# Allegro board MOCKINGBIRD_R01_20150507.brd
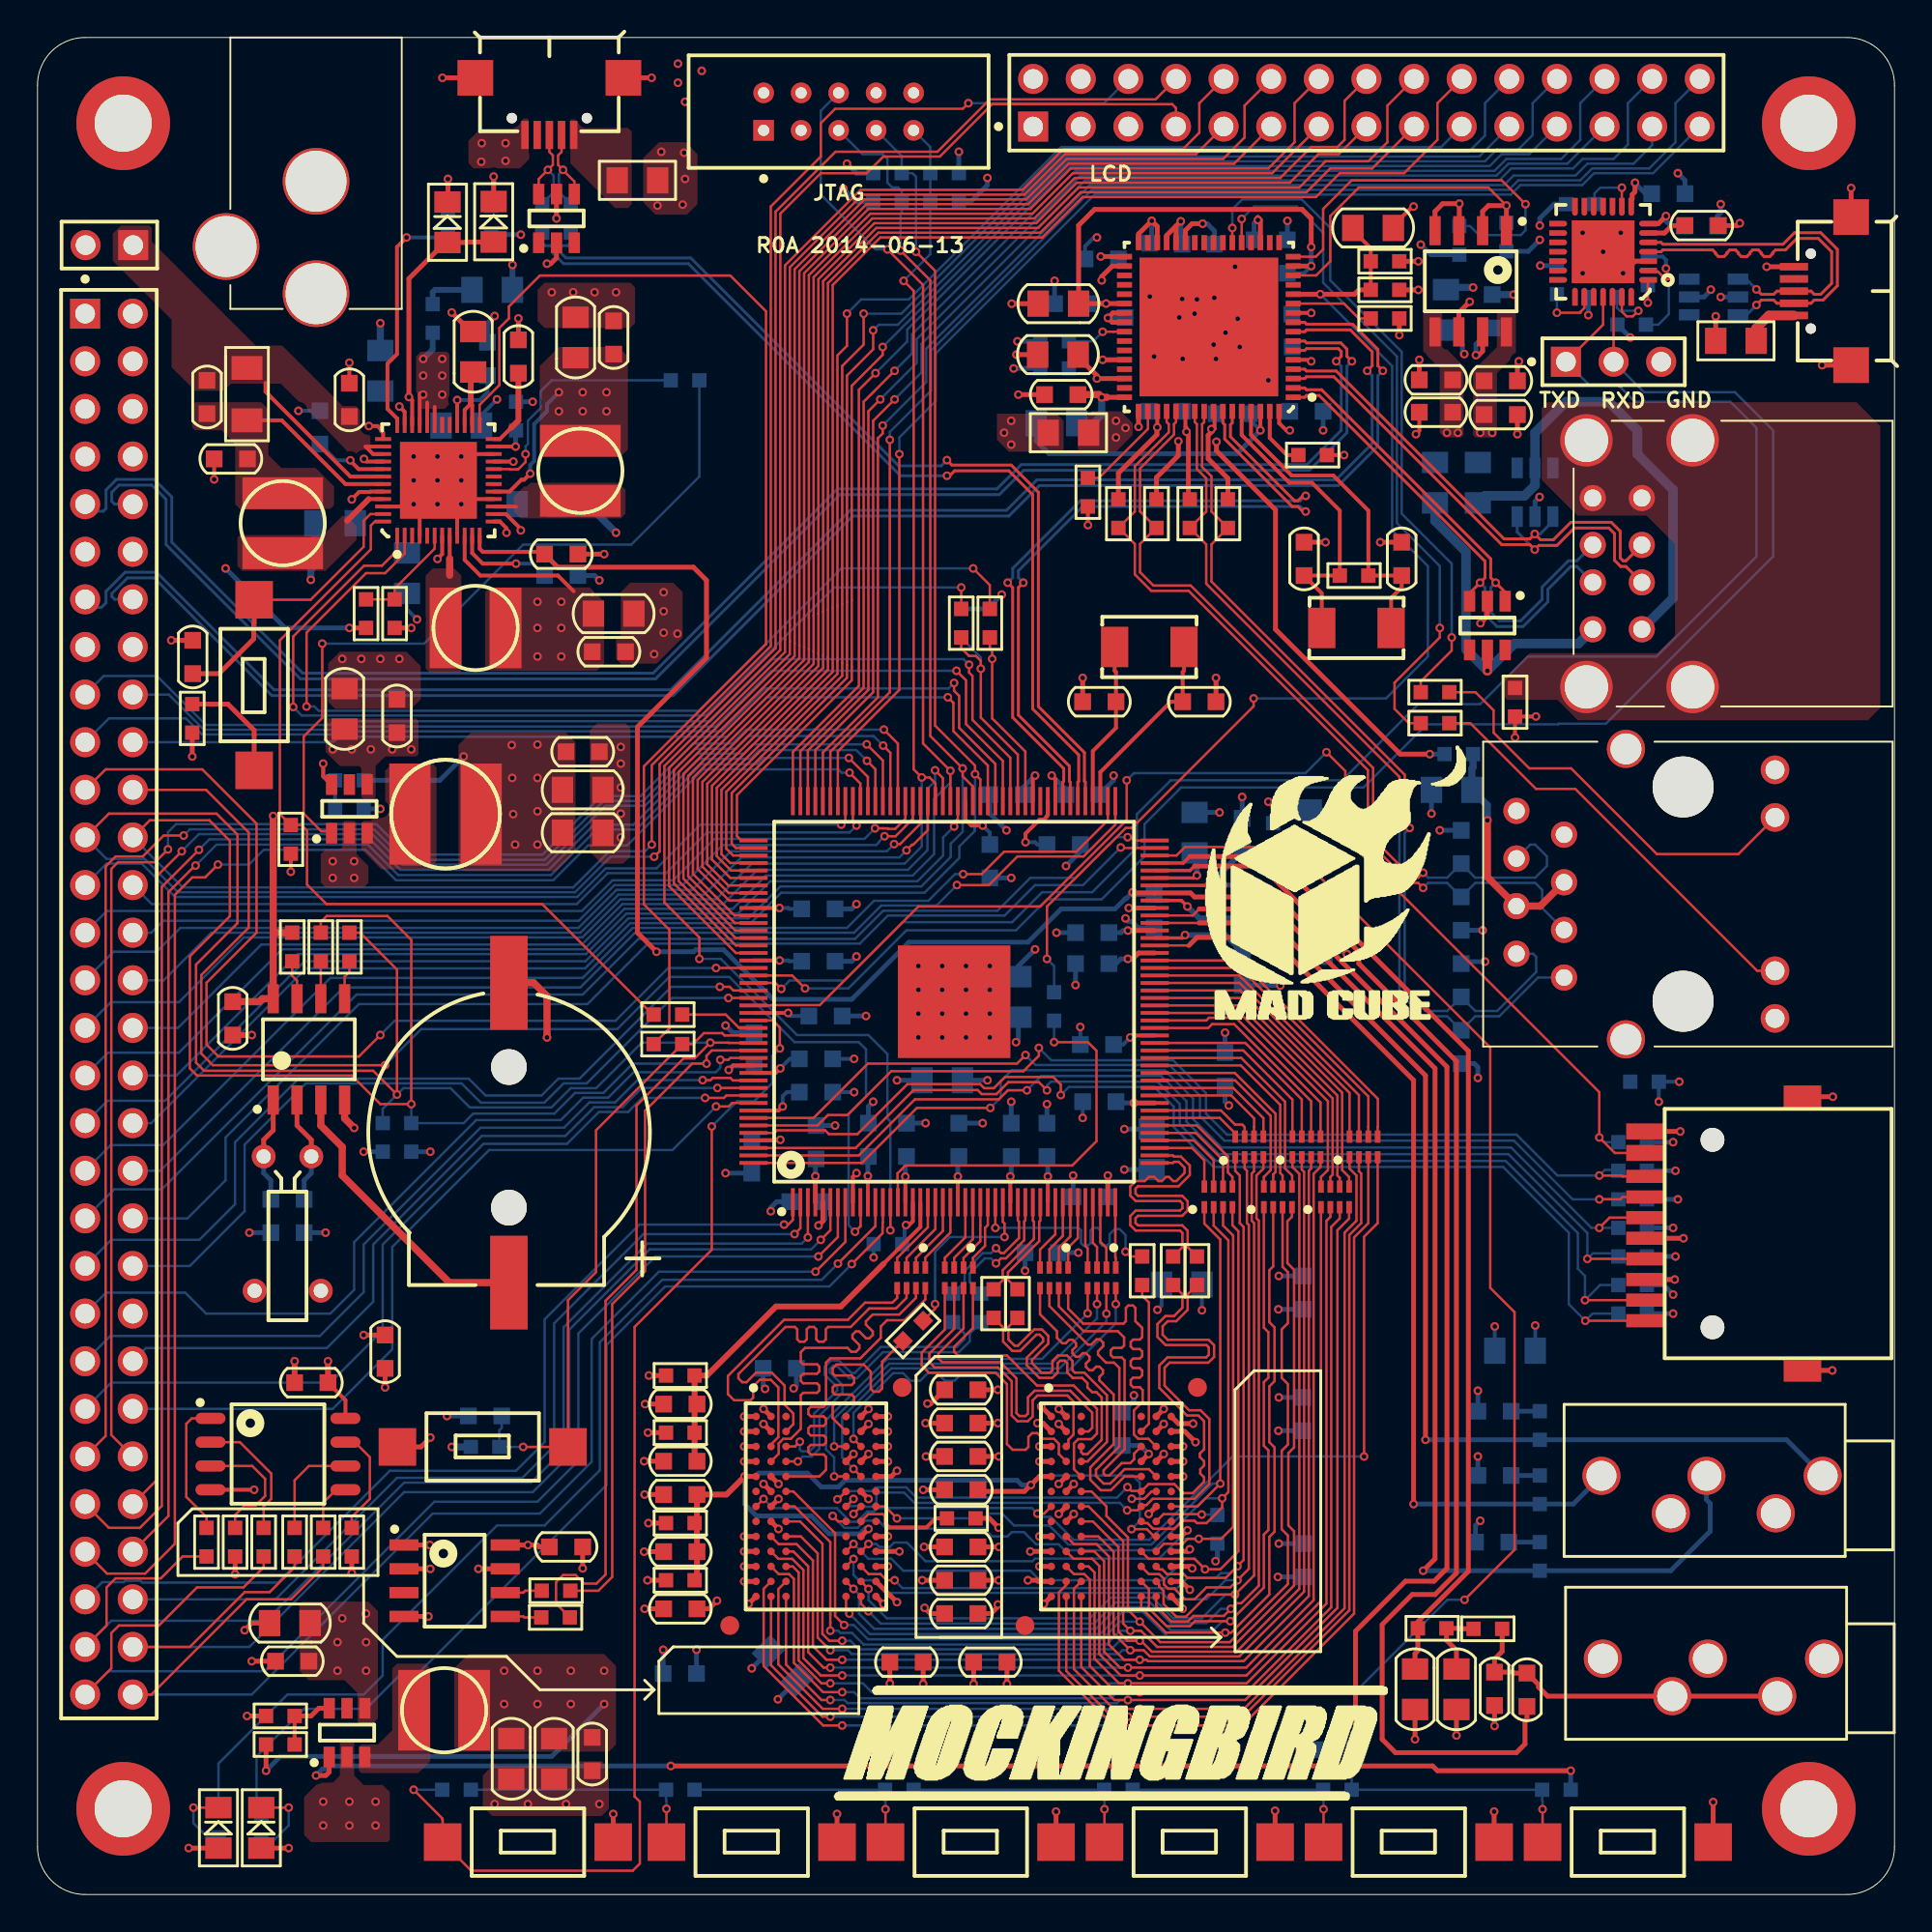
[diagram p0: board, top side]
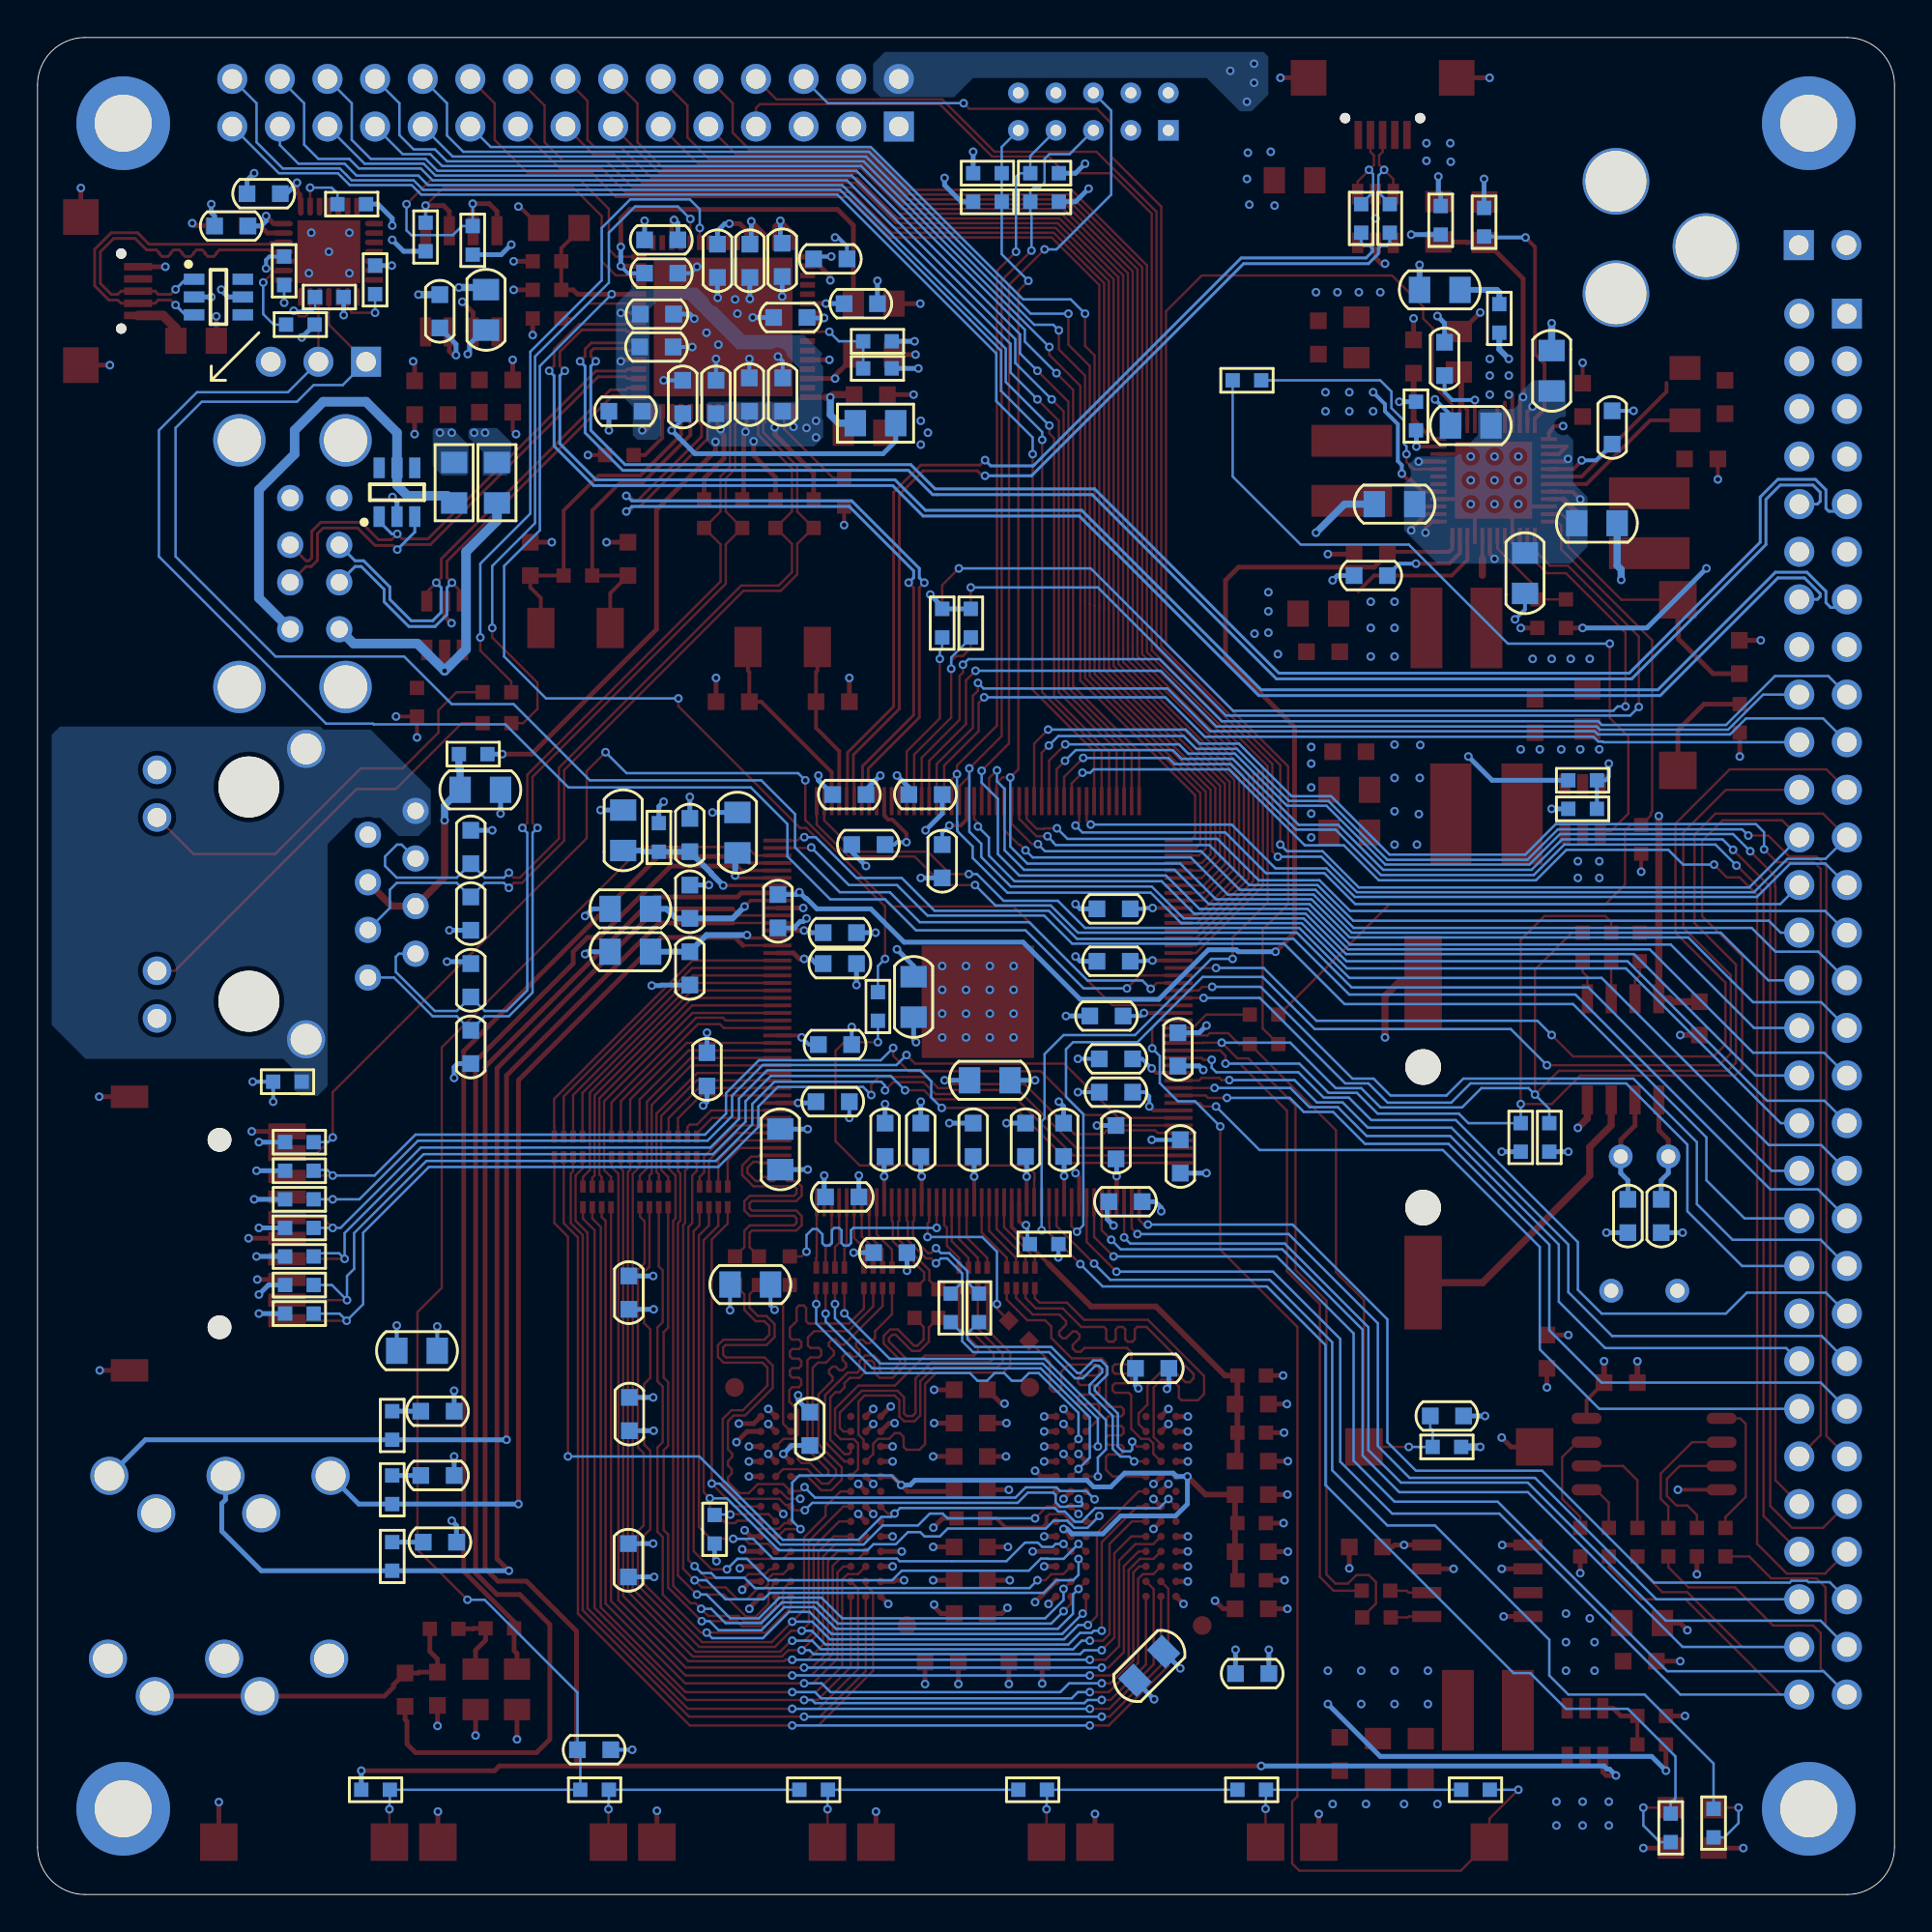
[diagram p1: board, bottom side, seen from below]

Outline 99.06 x 99.06 mm; copper layers: TOP, L2_GND, L3_PWR, BOTTOM. Coordinates in mm from the lower left corner of the outline.
Outline path: 0,96.52 0,2.54 arc(0.74,0.74) 2.54,0 96.52,0 arc(98.32,0.74) 99.06,2.54 99.06,96.52 arc(98.32,98.32) 96.52,99.06 2.54,99.06 arc(0.74,98.32) 0,96.52

## Design rules (mm)
net group AXP209_CHGLED: nets AXP209_CHGLED N768578
net group AXP209_EXTEN: nets AXP209_EXTEN N1015946
net group AXP209_INT#: nets AXP209_INT# NMI#
net group AXP209_PWROK: nets AXP209_PWROK CPU_RST#
net group DDRA0: nets DDR_A0 DDRA0
net group DDRA1: nets DDR_A1 DDRA1
net group DDRA2: nets DDR_A2 DDRA2
net group DDRA3: nets DDR_A3 DDRA3
net group DDRA4: nets DDR_A4 DDRA4
net group DDRA5: nets DDR_A5 DDRA5
net group DDRA6: nets DDR_A6 DDRA6
net group DDRA7: nets DDR_A7 DDRA7
net group DDRA8: nets DDR_A8 DDRA8
net group DDRA9: nets DDR_A9 DDRA9
net group DDRA10: nets DDR_A10 DDRA10
net group DDRA11: nets DDR_A11 DDRA11
net group DDRA12: nets DDR_A12 DDRA12
net group DDRA13: nets DDR_A13 DDRA13
net group DDRA14: nets DDR_A14 DDRA14
net group DDRBA0: nets DDR_BA0 DDRBA0
net group DDRBA1: nets DDR_BA1 DDRBA1
net group DDRBA2: nets DDR_BA2 DDRBA2
net group DDRCAS: nets DDR_CAS DDRCAS
net group DDRCK_N: nets DDR_CK_N DDRCK_N
net group DDRCK_P: nets DDR_CK_P DDRCK_P
net group DDRCKE: nets DDR_CKE DDRCKE
net group DDRD0: nets DDR_D0 DDRD0
net group DDRD1: nets DDR_D1 DDRD1
net group DDRD2: nets DDR_D2 DDRD2
net group DDRD3: nets DDR_D3 DDRD3
net group DDRD4: nets DDR_D4 DDRD4
net group DDRD5: nets DDR_D5 DDRD5
net group DDRD6: nets DDR_D6 DDRD6
net group DDRD7: nets DDR_D7 DDRD7
net group DDRD8: nets DDR_D8 DDRD8
net group DDRD9: nets DDR_D9 DDRD9
net group DDRD10: nets DDR_D10 DDRD10
net group DDRD11: nets DDR_D11 DDRD11
net group DDRD12: nets DDR_D12 DDRD12
net group DDRD13: nets DDR_D13 DDRD13
net group DDRD14: nets DDR_D14 DDRD14
net group DDRD15: nets DDR_D15 DDRD15
net group DDRDM0: nets DDR_DM0 DDRDM0
net group DDRDM1: nets DDR_DM1 DDRDM1
net group DDRDQS0_N: nets DDR_DQS0_N DDRDQS0_N
net group DDRDQS0_P: nets DDR_DQS0_P DDRDQS0_P
net group DDRDQS1_N: nets DDR_DQS1_N DDRDQS1_N
net group DDRDQS1_P: nets DDR_DQS1_P DDRDQS1_P
net group DDRODT: nets DDR_ODT DDRODT
net group DDRRAS: nets DDR_RAS DDRRAS
net group DDRRST: nets DDR_RST DDRRST
net group DDRWE: nets DDR_WE DDRWE
net group DIFF_MDI_RX: nets MDI_RXN MDI_RXP
net group DIFF_MDI_TX: nets MDI_TXN MDI_TXP
net group DIFF_USB2: nets USB_DM2 USB_DP2
net group DIFF_USB3: nets USB_DM3 USB_DP3
net group DIFF_USB4: nets USB_DM4 USB_DP4
net group DIFF_USB5: nets USB_DM5 USB_DP5
net group DIFF_USB_COM: nets USB_COM_DM USB_COM_DP
net group DIFF_USB_HOST: nets USB_HOST_DM USB_HOST_DP
net group HPCOM: nets HPCOM N1125541
net group HPOUTL: nets HPOUTL N1125509
net group HPOUTR: nets HPOUTR N1125489
net group I2C0_SCL: nets I2C0_SCL N764072
net group I2C0_SDA: nets I2C0_SDA N764092
net group LAN9154_ETHPLL: nets LAN9154_ETHPLL LAN9154_USBPLL
net group LAN9514_RESET: nets LAN9514_RESET PG12
net group LAN9514_XI: nets LAN9514_XI LAN9514_XO
net group N757560: nets N757560 N757568
net group NLINKA_LED: nets N526028 NLINKA_LED
net group NSPD_LED: nets N522155 NSPD_LED
net group PC0: nets N756296 PC0
net group PC1: nets N756292 PC1
net group PC2: nets N756264 PC2
net group PC3: nets N756260 PC3
net group PG9: nets N747536 PG9
net group PG10: nets N747502 PG10
net group USB_DS_DM: nets USB_DS_DM USB_OTG_DM
net group USB_DS_DP: nets USB_DS_DP USB_OTG_DP
net group LRADC: nets LRADC N873165 N873197 N873229 N873261 UBOOT
net group MICIN: nets MICIN N1125465 N1125661 VMIC
net group PB17: nets N746922 N938713 PB17
net group PB18: nets N746926 N938717 PB18

## Placement (name value [footprint] x y rotation side)
BT1  BAT_CR1220  [CR1220]  25.15 40.64 270 top
C2  0.1uF  [C0603]  34.29 23.11 90 top
C3  22pF  [C0603]  56.64 63.63 270 top
C4  0.1uF  [C0603]  34.29 26.16 270 top
C5  22pF  [C0603]  61.98 63.63 90 top
C6  1uF  [C0603]  23.88 25.53 90 bottom
C7  10uF  [C0805]  67.44 52.58 270 bottom
C8  0.1uF  [C0603]  64.26 52.96 0 bottom
C9  4.7uF  [C0805]  67.82 56.77 0 bottom
C10  0.1uF  [C0603]  64.26 56.52 0 bottom
C11  1uF  [C0805]  61.72 56.64 0 bottom
C12  10uF  [C0805]  67.44 50.29 270 bottom
C13  0.1uF  [C0603]  64.26 49.4 180 bottom
C14  10uF  [C0805]  61.04 32.54 270 bottom
C15  0.1uF  [C0603]  56.13 37.21 90 bottom
C16  0.1uF  [C0603]  56.52 45.34 90 bottom
C17  0.1uF  [C0603]  51.94 40.26 0 bottom
C18  0.1uF  [C0603]  49.15 40.26 0 bottom
C19  0.1uF  [C0603]  56.64 42.29 90 bottom
C20  10uF  [C0805]  52.32 47.88 180 bottom
C21  0.1uF  [C0603]  41.66 49.78 270 bottom
C22  0.1uF  [C0603]  53.85 40.26 0 bottom
C23  0.1uF  [C0603]  50.8 55.12 180 bottom
C24  0.1uF  [C0603]  54.74 56.01 270 bottom
C25  0.1uF  [C0603]  56.26 49.66 90 bottom
C26  10uF  [C0805]  48.26 43.43 270 bottom
C27  0.1uF  [C0603]  41.53 42.8 270 bottom
C29  0.1uF  [C0603]  41.53 44.58 270 bottom
C30  0.1uF  [C0603]  46.36 40.26 0 bottom
C31  0.1uF  [C0603]  38.1 39.37 180 bottom
C32  0.1uF  [C0603]  44.32 40.26 0 bottom
C33  0.1uF  [C0603]  41.53 40.13 0 bottom
C34  0.1uF  [C0603]  42.04 46.86 270 bottom
C35  10uF  [C0805]  54.43 82.14 270 top
C36  0.1uF  [C0603]  56.26 51.31 90 bottom
C37  0.1uF  [C0603]  55.75 58.67 270 bottom
C38  0.1uF  [C0603]  41.02 36.96 90 bottom
C39  0.1uF  [C0603]  38.23 45.09 0 bottom
C40  0.1uF  [C0603]  41.66 52.58 270 bottom
C41  0.1uF  [C0603]  51.69 58.67 90 bottom
C42  0.1uF  [C0603]  49.28 21.59 270 top
C46  0.1uF  [C0603]  34.29 21.34 90 top
C47  0.1uF  [C0603]  34.29 18.29 270 top
C48  0.1uF  [C0603]  14.61 27.3 270 top
C49  10uF  [C0805]  59.44 39.75 0 bottom
C50  0.1uF  [C0603]  49.28 16.76 270 top
C51  0.1uF  [C0603]  67.49 25.63 180 bottom
C52  0.1uF  [C0603]  67.54 17.83 180 bottom
C53  0.1uF  [C0603]  49.28 14.99 90 top
C54  0.1uF  [C0603]  34.26 11.79 270 bottom
C55  0.1uF  [C0603]  46.36 12.4 90 top
C56  0.1uF  [C0603]  49.28 25.15 270 top
C57  0.1uF  [C0603]  49.28 23.37 90 top
C64  0.1uF  [C0603]  63.35 44.02 180 bottom
C65  0.1uF  [C0603]  53.57 34.24 270 bottom
C66  0.1uF  [C0603]  50.83 12.4 90 top
C68  0.1uF  [C0603]  18.54 28.96 0 top
C69  10uF  [C0805]  39.75 12.19 225 bottom
C70  0.1uF  [C0603]  67.51 32.11 0 bottom
C72  0.1uF  [C0603]  34.29 15.24 270 top
C76  0.1uF  [C0603]  39.6 28.07 270 bottom
C77  0.1uF  [C0603]  57.86 24.84 0 bottom
C78  0.1uF  [C0603]  49.28 26.92 90 top
C79  0.1uF  [C0603]  49.28 18.54 90 top
C90  0.1uF  [C0603]  77.6 18.8 90 bottom
C91  0.1uF  [C0603]  77.72 22.35 90 bottom
C92  0.1uF  [C0603]  77.72 25.78 90 bottom
C93  1uF  [C0603]  69.37 7.72 90 bottom
C94  0.1uF  [C0603]  79.45 10.92 0 top
C95  3.3nF  [C0603]  77.72 10.97 0 top
C96  10uF  [C0805]  75.69 10.95 0 top
C97  10uF  [C0805]  73.48 10.95 0 top
C98  0.1uF  [C0603]  77.6 84.45 0 bottom
C99  10uF  [C0805]  75.13 84.53 0 bottom
C100  1uF  [C0603]  78.05 78.94 270 top
C101  0.1uF  [C0603]  78.05 80.75 270 top
C102  0.1uF  [C0603]  54.61 80.01 90 top
C103  4.7uF  [C0603]  64.64 79.88 180 bottom
C104  1uF  [C0603]  74.6 79.07 90 top
C105  0.11uF  [C0603]  74.6 80.8 90 top
C108  10uF NC  [C0805]  71.25 88.9 270 top
C109  22pF  [C0603]  72.77 71.25 0 top
C110  15pF  [C0603]  75.95 45.21 180 bottom
C111  15pF  [C0603]  75.95 48.77 0 bottom
C112  15pF  [C0603]  75.95 52.32 180 bottom
C113  15pF  [C0603]  75.95 55.88 0 bottom
C114  22nF  [C0805]  75.44 58.93 90 bottom
C115  22pF  [C0603]  67.56 71.25 0 top
C116  10uF  [C0805]  54.46 84.86 270 top
C117  0.1uF  [C0603]  55.14 84.86 90 bottom
C118  0.1uF  [C0603]  65.79 86.49 90 bottom
C119  10uF  [C0805]  78.82 29.01 90 bottom
C120  0.1uF  [C0603]  61.06 87.15 180 bottom
C121  0.1uF  [C0603]  58.9 84.12 270 bottom
C122  0.1uF  [C0603]  56.77 87.25 90 bottom
C123  0.1uF  [C0603]  59.33 87.2 180 bottom
C124  0.1uF  [C0603]  65.79 88.27 270 bottom
C125  0.1uF  [C0603]  62.79 87.15 180 bottom
C127  0.1uF  [C0603]  66.01 84.3 90 bottom
C128  0.1uF  [C0603]  62.86 79.88 0 bottom
C129  0.1uF  [C0603]  67.69 79.12 270 bottom
C130  0.1uF  [C0603]  66.04 82.55 90 bottom
C131  0.1uF  [C0603]  59.31 80.01 0 bottom
C132  0.1uF  [C0603]  61.09 80.01 0 bottom
C133  0.1uF NC  [C0603]  88.77 89.03 90 top
C134  1uF NC  [C0603]  88.72 89 270 bottom
C135  0.1uF NC  [C0603]  87 90.73 270 bottom
C136  0.1uF  [C0603]  10.41 46.74 0 top
C137  0.1uF  [C0603]  28.19 18.54 90 top
C138  22pF  [C0603]  12.45 36.2 0 bottom
C139  22pF  [C0603]  14.22 36.2 0 bottom
C140  10uF  [C0805]  24.26 85.6 270 bottom
C141  1uF  [C0603]  9.04 79.88 0 top
C143  4.7uF  [C0603]  10.31 76.58 270 top
C144  10uF  [C0805]  19.71 70.48 0 bottom
C145  4.7uF  [C0603]  16.64 79.73 180 top
C147  22uF  [C0805]  16.38 63.25 180 top
C148  0.1uF  [C0603]  19.18 62.87 180 top
C149  10uF  [C0805]  29.08 56.64 90 top
C151  10uF  [C0805]  18.29 81.28 180 bottom
C152  10uF  [C0805]  30.73 68.33 90 top
C153  1nF  [C0603]  30.48 66.29 90 top
C155  10uF  [C0805]  29.08 58.93 90 top
C156  0.1uF  [C0603]  29.08 60.96 90 top
C158  10uF  [C0805]  15.88 73.15 270 bottom
C159  10uF  [C0805]  28.7 83.06 180 top
C160  1nF  [C0603]  30.73 83.06 180 top
C161  10uF  [C0805]  22.61 78.36 90 bottom
C162  1uF  [C0603]  24 81.91 180 bottom
C163  10uF  [C0805]  25.27 7.24 0 top
C164  4.7uF  [C0603]  27.94 71.5 270 top
C165  22uF  [C0805]  13.46 14.48 270 top
C166  10uF  [C0805]  27.56 7.24 0 top
C167  0.1uF  [C0603]  13.59 12.45 270 top
C168  0.1uF  [C0603]  29.59 7.49 0 top
C169  10uF  [C0805]  26.67 74.17 270 bottom
C170  1uF  [C0603]  15.06 78.26 180 bottom
C171  10uF  [C0805]  23.24 82.3 180 top
C172  1uF  [C0603]  27.94 70.36 90 bottom
C173  1uF  [C0603]  25.65 82.04 180 top
C174  1nF  [C0603]  8.28 66.01 180 top
C175  0.1uF  [C0603]  59.56 52.45 180 bottom
D6  SRV05 NC  [SOT23-6]  77.34 67.69 270 top
D7  SRV05 NC  [SOT23-6]  79.88 74.8 90 bottom
D8  SRV05 NC  [SOT23-6]  89.41 85.22 180 bottom
D9  SRV05 NC  [SOT23-6]  27.69 89.41 90 top
FB5  120R  [R0805]  76.84 75.31 180 bottom
FB6  120R  [R0805]  54.36 78.49 90 bottom
FB7  120R  [R0805]  74.55 75.31 180 bottom
FB8  120R  [R0805]  54.99 77.98 90 top
FB9  120R NC  [R0805]  90.6 82.88 270 top
FB10  120R NC  [R0805]  32 91.44 90 top
J1  AUDIO  [AUDIO3_5]  89.03 21.23 180 top
J2  AUDIO  [AUDIO3_5]  89.1 11.48 180 top
J3  -  [HR911105A]  87.78 53.37 270 top
J4  EXT_IO  [SIP30X2]  2.54 84.33 270 top
J5  EXT_IO_B  [SIP15X2]  53.11 94.31 0 top
J7  JTAG  [JTAG_10]  38.73 94.11 0 top
J8  DEBUG_UART  [SIP3]  81.53 81.76 0 top
J10  BAT_Li  [SIP2]  5.11 87.99 180 top
L1  2.2uH  [CD43]  13.08 73.15 90 top
L2  4.7uH  [CD54]  21.77 57.63 0 top
L3  2.2uH  [CD43]  23.37 67.56 0 top
L4  2.2uH  [CD43]  28.96 75.95 90 top
L5  2.2uH  [CD43]  21.69 9.83 0 top
LD2  GREEN  [LED0805]  9.65 3.56 180 top
LD3  GREEN  [LED0805]  11.94 3.56 180 top
LD4  CHARGE  [LED0805]  21.87 89.2 180 top
LD5  POWER  [LED0805]  24.33 89.23 180 top
NOREF  -  []  2.54 0 90 top
NOREF#2  -  []  42.55 5.08 0 top
NOREF#3  -  []  62.36 46.74 0 top
NOREF#4  -  []  0 2.54 0 top
P1  TF_Card  [TF_CARD]  85.75 30.61 90 top
P3  CON_USB_A_F_2X1  [USB_A_F_2X1]  88.29 70.99 90 top
P4  MicroUSB Female NC  [USB_MICRO_F_SMT]  98.9 85.53 90 top
P5  MicroUSB Female  [USB_MICRO_F_SMT]  27.3 99.06 180 top
P7  DC_JACK_5  [DC005]  14.86 88.39 270 top
R1  2.2K  [R0603]  49.28 67.06 90 bottom
R2  2.2K  [R0603]  50.8 67.06 90 bottom
R3  2.2K  [R0603]  18.42 41.15 270 bottom
R4  2.2K  [R0603]  19.94 41.15 270 bottom
R14  22R  [R0603]  60.58 32.51 90 top
R15  22R  [R0603]  48.84 32.05 270 bottom
R16  22R  [R0603]  61.85 32.51 90 top
R17  22R  [R0603]  50.34 32.05 270 bottom
R18  22R  [R0603]  51 32.28 270 top
R19  22R  [R0603]  52.27 32.28 270 top
R20  22R  [R0603]  47.24 30.61 225 top
R21  22R  [R0603]  58.93 34.04 270 top
R22  240R 1%  [R0603]  46.13 34.7 180 bottom
R24  2K 1%  [R0603]  33.53 24.64 0 top
R25  100R  [R0603]  34.39 45.36 180 top
R26  0R  [R0603]  34.39 46.94 180 top
R27  2K 1%  [R0603]  35.05 27.69 180 top
R28  200K 1%  [R0603]  65.91 57.15 270 bottom
R29  240R 1%  [R0603]  48.51 20.07 0 top
R30  240R 1%  [R0603]  62.94 20.24 270 bottom
R31  2K 1%  [R0603]  33.53 19.81 0 top
R32  2K 1%  [R0603]  35.05 16.76 180 top
R33  4.7K  [R0603]  10.54 19.56 270 top
R34  4.7K  [R0603]  16.76 19.56 270 top
R35  0R  [R0603]  9.02 18.03 90 top
R36  0R  [R0603]  13.72 18.03 90 top
R37  0R  [R0603]  12.07 19.56 270 top
R38  0R  [R0603]  15.24 19.56 270 top
R39  10K  [R0603]  84.33 35.56 0 bottom
R40  10K  [R0603]  84.33 34.04 0 bottom
R41  10K  [R0603]  84.33 32.51 0 bottom
R42  10K  [R0603]  84.33 30.99 0 bottom
R43  10K  [R0603]  84.33 38.61 0 bottom
R44  10K  [R0603]  84.33 40.13 0 bottom
R45  40K NC  [R0603]  85.85 37.08 180 bottom
R62  22R  [R0603]  80.14 17.27 90 bottom
R63  22R  [R0603]  80.14 20.83 90 bottom
R64  22R  [R0603]  80.14 24.26 90 bottom
R69  2.2K  [R0603]  76.61 14.17 0 top
R70  2.2K  [R0603]  73.63 14.2 0 top
R77  10K NC  [R0603]  78.36 89.18 270 bottom
R78  10K NC  [R0603]  75.84 89 270 bottom
R79  12K  1%  [R0603]  68.78 76.78 180 top
R80  10K  [R0603]  55.02 81.41 180 bottom
R81  12.4K 1%  [R0603]  56.03 74.04 90 top
R82  10K NC  [R0603]  53.49 82.85 0 bottom
R83  10K  [R0603]  71.12 85.6 0 top
R84  10K NC  [R0603]  72.64 87.12 180 top
R85  0R  [R0603]  54.23 48.13 270 bottom
R86  49.9R 1%  [R0603]  61.47 72.9 90 top
R87  49.9R 1%  [R0603]  63.5 72.9 90 top
R88  49.9R 1%  [R0603]  57.66 72.9 90 top
R89  49.9R 1%  [R0603]  59.69 72.9 90 top
R90  10R 1%  [R0603]  76.58 60.83 180 bottom
R91  10K  [R0603]  71.12 84.07 0 top
R92  1M  [R0603]  69.47 70.36 0 top
R93  330R  [R0603]  73.79 62.48 0 top
R94  330R  [R0603]  73.79 64.14 0 top
R95  0R  [R0603]  86.49 43.36 180 bottom
R96  10K NC  [R0603]  47.62 91.82 0 bottom
R97  10K NC  [R0603]  46.1 91.82 180 bottom
R98  10K NC  [R0603]  46.1 90.3 180 bottom
R99  10K NC  [R0603]  47.62 90.3 0 bottom
R100  4.7K NC  [R0603]  85.8 83.74 180 bottom
R101  4.7K NC  [R0603]  85.9 85.85 90 bottom
R102  4.7K NC  [R0603]  84.25 85.22 180 bottom
R103  4.7K NC  [R0603]  81.05 85.37 90 bottom
R104  4.7K NC  [R0603]  83.06 90.17 180 bottom
R105  2K  [R0603]  13.59 49.78 90 top
R106  0R  [R0603]  15.11 49.78 90 top
R107  0R  [R0603]  26.9 16.21 0 top
R108  0R  [R0603]  16.64 49.78 90 top
R109  0R  [R0603]  26.87 14.78 0 top
R110  510R  [R0603]  9.65 3.05 90 bottom
R111  510R  [R0603]  11.94 2.79 90 bottom
R112  100K  [R0603]  80.26 5.59 0 bottom
R113  6.8K  [R0603]  70.1 5.59 180 bottom
R114  8.2K  [R0603]  58.42 5.59 180 bottom
R115  10K  [R0603]  46.74 5.59 180 bottom
R116  11K  [R0603]  35.05 5.59 180 bottom
R117  13K  [R0603]  23.11 5.59 180 bottom
R118  1R  [R0603]  21.08 83.31 90 bottom
R119  0.03R 1%  [R1206]  11.18 80.04 0 top
R120  9.1K 1%  [R0603]  15.88 59.44 0 bottom
R121  0R  [R0603]  78.82 62.84 90 top
R122  0R  [R0603]  50.8 68.58 270 top
R123  4.7K NC  [R0603]  17.53 67.56 90 top
R125  0R  [R0603]  49.28 68.58 270 top
R126  2K 1%  [R0603]  15.88 57.91 0 bottom
R127  4.7K  [R0603]  19.05 69.09 270 top
R129  0R  [R0603]  33.78 80.77 0 bottom
R130  200K 1%  [R0603]  25.53 78.1 90 bottom
R132  15K 1%  [R0603]  13.72 8 180 top
R133  10K 1%  [R0603]  13.72 9.53 180 top
R134  2.2K  [R0603]  21.89 89.97 270 bottom
R135  2.2K  [R0603]  24.21 90.07 270 bottom
R136  2.2K  [R0603]  8.26 63.5 270 top
R137  22R  [RN0402]  62.99 37.21 90 top
R138  22R  [RN0402]  64.64 39.88 90 top
R139  22R  [RN0402]  66.17 37.21 90 top
R140  22R  [RN0402]  67.69 39.88 90 top
R141  22R  [RN0402]  69.22 37.21 90 top
R142  22R  [RN0402]  70.74 39.88 90 top
R143  22R  [RN0402]  56.77 32.89 270 top
R144  22R  [RN0402]  54.23 32.89 270 top
R145  22R  [RN0402]  49.15 32.89 270 top
R146  22R  [RN0402]  46.61 32.89 270 top
R147  0R  [R0603]  28.45 90.17 270 bottom
R148  0R  [R0603]  26.92 90.17 270 bottom
R149  10K  [R0603]  23.11 23.88 0 bottom
R150  51K  [R0603]  13.51 55.52 90 top
SW1  RST_KEY  [SW_2P_SMT]  23.75 23.88 0 top
SW2  USR_KEY  [SW_2P_SMT]  84.84 2.79 0 top
SW3  USR_KEY  [SW_2P_SMT]  73.15 2.79 0 top
SW4  USR_KEY  [SW_2P_SMT]  61.47 2.79 0 top
SW5  USR_KEY  [SW_2P_SMT]  49.78 2.79 0 top
SW6  USR_KEY  [SW_2P_SMT]  38.1 2.79 0 top
SW7  USR_KEY  [SW_2P_SMT]  26.16 2.79 0 top
SW9  PWR_KEY  [SW_2P_SMT]  11.56 64.52 90 top
TH1  TH_3mm  [TH3_0]  94.49 4.57 0 top
TH2  TH_3mm  [TH3_0]  94.49 94.49 0 top
TH3  TH_3mm  [TH3_0]  4.57 94.49 0 top
TH4  TH_3mm  [TH3_0]  4.57 4.57 0 top
U1  A13  [ELQFP176]  48.89 47.62 90 top
U2  H5TQ2G83  [BGA78]  41.53 20.7 0 top
U3  H5TQ2G83  [BGA78]  57.28 20.7 0 top
U4  W25Q64BVSS  [WSOP8_208]  12.83 23.5 0 top
U8  MIC2026-1YM  [SO8]  76.45 86.06 270 top
U9  LAN9514  [QFN64]  62.48 83.62 180 top
U11  CP2102 NC  [QFN28]  83.52 87.63 180 top
U12  DS1307  [SO8]  14.48 45.09 90 top
U13  AT24C64  [SO8]  22.25 16.74 0 top
U14  AXP209  [QFN48]  21.39 75.44 90 top
U15  SY8009B  [SOT23-6]  16.64 57.91 90 top
U16  SY8009B  [SOT23-6]  16.51 8.64 90 top
Y1  24M  [5032-2P]  59.31 66.55 0 top
Y2  25M  [5032-2P]  70.36 67.56 180 top
Y3  32.768KHz  [XTAL_32KHZ]  14.61 39.37 180 top

## Library data of the parts
BT1 = BATTERY
C2 C4 C6 C8 C10 C13 C15-C19 C21-C25 C27 C29-C34 C36-C42 C46 C47 C50-C57 C64-C66 C68 C70 C72 C76-C79 C90-C92 C94 C98 C100 C102 C104 C116-C118 C120-C125 C127-C132 C136 C137 C175 = CAP NP: signal model: DEFAULT_CAPACITOR_100000pF_2_1
C3 C5 = CAP NP: signal model: DEFAULT_CAPACITOR_33pF_2_1
C7 C12 C14 C20 C26 C35 C49 C69 C96 C97 C99 C119 C140 C144 C151 C152 C158 C159 C161 C162 C164 C169-C172 = CAP NP: signal model: DEFAULT_CAPACITOR_1e+07pF_2_1
C9 C103 C143 C145 = CAP NP: signal model: DEFAULT_CAPACITOR_4.7e+06pF_2_1
C11 C101 C105 C141 C173 = CAP NP: signal model: DEFAULT_CAPACITOR_1e+06pF_2_1
C48 C149 C156 C167 C168 = CAP_CE_0603: signal model: DEFAULT_CAPACITOR_100000pF_2_1
C93 C108 C134 C135 = CAP NP
C95 = CAP NP: signal model: DEFAULT_CAPACITOR_3300pF_2_1
C109 C115 C138 C139 = CAP NP: signal model: DEFAULT_CAPACITOR_22pF_2_1
C110-C113 = CAP NP: signal model: DEFAULT_CAPACITOR_15pF_2_1
C114 = CAP NP: signal model: DEFAULT_CAPACITOR_22000pF_2_1
C133 = CAP_CE_0603
C147 C148 C163 C166 = CAP_CE_0603: signal model: DEFAULT_CAPACITOR_1e+07pF_2_1
C153 C160 C174 = CAP NP: signal model: DEFAULT_CAPACITOR_1000pF_2_1
C155 C165 = CAP_CE_0603: signal model: DEFAULT_CAPACITOR_2.2e+07pF_2_1
D6-D9 = SRV05-4
FB5-FB8 = FB: signal model: DEFAULT_RESISTOR_120OHM_2_1
FB9 FB10 = FB
J1 J2 = AUDIO
J3 = HR911105A
J4 = HEADER 30X2
J5 = HEADER 15X2
J7 = CON10_JTAG
J8 = HEADER 3
J10 = CON2
L1 L3-L5 = INDUCTOR: signal model: DEFAULT_INDUCTOR_2200nH_2_1
L2 = INDUCTOR: signal model: DEFAULT_INDUCTOR_4700nH_2_1
LD2-LD5 = LED
P1 = TF_CARD
P3 = CON_USB_A_F_2X1
P4 P5 = CON_USB_MICRO_F: User Part Number: pn; Tolerance: RichardLC
P7 = DC_JACK
R1 R2 R33 R34 = RES_0603: signal model: DEFAULT_RESISTOR_4700OHM_2_1
R3 R4 R100-R104 = RES_0603
R14-R21 R62-R64 = R: signal model: DEFAULT_RESISTOR_22OHM_2_1
R22 R28-R30 R45 R79 R81 R82 R84 R95-R99 R119-R121 R123 R126 R130 R132 R133 R149 R150 = R
R24 R27 R31 R32 R105 = R: signal model: DEFAULT_RESISTOR_2000OHM_2_1
R25 R26 R35-R38 R85 R92 R106-R109 R122 R125 R129 R147 R148 = R: signal model: DEFAULT_RESISTOR_0.001OHM_2_1
R39-R44 R77 R78 R80 R83 R91 R115 = R: signal model: DEFAULT_RESISTOR_10000OHM_2_1
R69 R70 R134-R136 = R: signal model: DEFAULT_RESISTOR_2200OHM_2_1
R86-R89 = R: signal model: DEFAULT_RESISTOR_49.9OHM_2_1
R90 = R: signal model: DEFAULT_RESISTOR_10OHM_2_1
R93 R94 = R: signal model: DEFAULT_RESISTOR_330OHM_2_1
R110 R111 = R: signal model: DEFAULT_RESISTOR_510OHM_2_1
R112 = R: signal model: DEFAULT_RESISTOR_100000OHM_2_1
R113 = R: signal model: DEFAULT_RESISTOR_6800OHM_2_1
R114 = R: signal model: DEFAULT_RESISTOR_8200OHM_2_1
R116 = R: signal model: DEFAULT_RESISTOR_11000OHM_2_1
R117 = R: signal model: DEFAULT_RESISTOR_13000OHM_2_1
R118 = R: signal model: DEFAULT_RESISTOR_1OHM_2_1
R127 = R: signal model: DEFAULT_RESISTOR_4700OHM_2_1
R137-R146 = 8P4R_0402: signal model: 8P4R_0402_RN0402_22R_22R
SW1-SW7 SW9 = SW KEY-SPST
TH1-TH4 = THROUGH_HOLE
U1 = A13
U2 U3 = H5TQ2G83
U4 = W25Q16BV
U8 = MIC2026-1YM
U9 = LAN9514
U11 = CP2102
U12 = DS1307
U13 = AT24C512
U14 = AXP209
U15 U16 = SY8009B
Y1 = HC-49S: signal model: DEFAULT_RESISTOR_0.024OHM_2_1
Y2 = HC-49S: signal model: DEFAULT_RESISTOR_0.025OHM_2_1
Y3 = ZTA

## Footprints (pads in the part's own frame, mm; a bottom-side part is the same pattern mirrored in y, then rotated)
5032-2P
  rect 1.45x2.15 smd: 1(-1.85,0) 2(1.85,0)
AUDIO3_5
  round 2.032 hole 1.6: 1(-6.2,-1.1) 2(0,-1.1) 3(1.9,0.9) 4(5.6,-1.1) 5(-3.7,0.9)
BGA78
  round 1 smd: (-4.6,-6.35) (4.6,6.35)
  round 0.4 smd: A1(-3.2,4.8) A2(-2.4,4.8) A3(-1.6,4.8) A7(1.6,4.8) A8(2.4,4.8) A9(3.2,4.8) B1(-3.2,4) B2(-2.4,4) B3(-1.6,4) B7(1.6,4) B8(2.4,4) B9(3.2,4) C1(-3.2,3.2) C2(-2.4,3.2) C3(-1.6,3.2) C7(1.6,3.2) C8(2.4,3.2) C9(3.2,3.2) D1(-3.2,2.4) D2(-2.4,2.4) D3(-1.6,2.4) D7(1.6,2.4) D8(2.4,2.4) D9(3.2,2.4) E1(-3.2,1.6) E2(-2.4,1.6) E3(-1.6,1.6) E7(1.6,1.6) E8(2.4,1.6) E9(3.2,1.6) F1(-3.2,0.8) F2(-2.4,0.8) F3(-1.6,0.8) F7(1.6,0.8) F8(2.4,0.8) F9(3.2,0.8) G1(-3.2,0) G2(-2.4,0) G3(-1.6,0) G7(1.6,0) G8(2.4,0) G9(3.2,0) H1(-3.2,-0.8) H2(-2.4,-0.8) H3(-1.6,-0.8) H7(1.6,-0.8) H8(2.4,-0.8) H9(3.2,-0.8) J1(-3.2,-1.6) J2(-2.4,-1.6) J3(-1.6,-1.6) J7(1.6,-1.6) J8(2.4,-1.6) J9(3.2,-1.6) K1(-3.2,-2.4) K2(-2.4,-2.4) K3(-1.6,-2.4) K7(1.6,-2.4) K8(2.4,-2.4) K9(3.2,-2.4) L1(-3.2,-3.2) L2(-2.4,-3.2) L3(-1.6,-3.2) L7(1.6,-3.2) L8(2.4,-3.2) L9(3.2,-3.2) M1(-3.2,-4) M2(-2.4,-4) M3(-1.6,-4) M7(1.6,-4) M8(2.4,-4) M9(3.2,-4) N1(-3.2,-4.8) N2(-2.4,-4.8) N3(-1.6,-4.8) N7(1.6,-4.8) N8(2.4,-4.8) N9(3.2,-4.8)
C0603
  rect 0.889x0.889 smd: 1(0,0.889) 2(0,-0.889)
C0805
  rect 1.397x1.143 smd: 1(0,1.079) 2(0,-1.079)
CD43
  rect 1.7x4.3 smd: 1(-1.6,0) 2(1.6,0)
CD54
  rect 2.2x5.4 smd: 1(-1.9,0) 2(1.9,0)
CR1220
  round 1.9 hole 1.9 unplated: (-3.5,0) (4,0)
  rect 5x2 smd: 1(8,0) 2(-8,0)
DC005
  round 3.556 hole 3.251: 1(2.997,0) 2(-2.997,0) 3(0.483,-4.801)
ELQFP176
  rect 1.5x0.2 smd: 1(-10.7,8.6) 2(-10.7,8.2) 3(-10.7,7.8) 4(-10.7,7.4) 5(-10.7,7) 6(-10.7,6.6) 7(-10.7,6.2) 8(-10.7,5.8) 9(-10.7,5.4) 10(-10.7,5) 11(-10.7,4.6) 12(-10.7,4.2) 13(-10.7,3.8) 14(-10.7,3.4) 15(-10.7,3) 16(-10.7,2.6) 17(-10.7,2.2) 18(-10.7,1.8) 19(-10.7,1.4) 20(-10.7,1) 21(-10.7,0.6) 22(-10.7,0.2) 23(-10.7,-0.2) 24(-10.7,-0.6) 25(-10.7,-1) 26(-10.7,-1.4) 27(-10.7,-1.8) 28(-10.7,-2.2) 29(-10.7,-2.6) 30(-10.7,-3) 31(-10.7,-3.4) 32(-10.7,-3.8) 33(-10.7,-4.2) 34(-10.7,-4.6) 35(-10.7,-5) 36(-10.7,-5.4) 37(-10.7,-5.8) 38(-10.7,-6.2) 39(-10.7,-6.6) 40(-10.7,-7) 41(-10.7,-7.4) 42(-10.7,-7.8) 43(-10.7,-8.2) 44(-10.7,-8.6) 89(10.7,-8.6) 90(10.7,-8.2) 91(10.7,-7.8) 92(10.7,-7.4) 93(10.7,-7) 94(10.7,-6.6) 95(10.7,-6.2) 96(10.7,-5.8) 97(10.7,-5.4) 98(10.7,-5) 99(10.7,-4.6) 100(10.7,-4.2) 101(10.7,-3.8) 102(10.7,-3.4) 103(10.7,-3) 104(10.7,-2.6) 105(10.7,-2.2) 106(10.7,-1.8) 107(10.7,-1.4) 108(10.7,-1) 109(10.7,-0.6) 110(10.7,-0.2) 111(10.7,0.2) 112(10.7,0.6) 113(10.7,1) 114(10.7,1.4) 115(10.7,1.8) 116(10.7,2.2) 117(10.7,2.6) 118(10.7,3) 119(10.7,3.4) 120(10.7,3.8) 121(10.7,4.2) 122(10.7,4.6) 123(10.7,5) 124(10.7,5.4) 125(10.7,5.8) 126(10.7,6.2) 127(10.7,6.6) 128(10.7,7) 129(10.7,7.4) 130(10.7,7.8) 131(10.7,8.2) 132(10.7,8.6)
  rect 0.2x1.5 smd: 45(-8.6,-10.7) 46(-8.2,-10.7) 47(-7.8,-10.7) 48(-7.4,-10.7) 49(-7,-10.7) 50(-6.6,-10.7) 51(-6.2,-10.7) 52(-5.8,-10.7) 53(-5.4,-10.7) 54(-5,-10.7) 55(-4.6,-10.7) 56(-4.2,-10.7) 57(-3.8,-10.7) 58(-3.4,-10.7) 59(-3,-10.7) 60(-2.6,-10.7) 61(-2.2,-10.7) 62(-1.8,-10.7) 63(-1.4,-10.7) 64(-1,-10.7) 65(-0.6,-10.7) 66(-0.2,-10.7) 67(0.2,-10.7) 68(0.6,-10.7) 69(1,-10.7) 70(1.4,-10.7) 71(1.8,-10.7) 72(2.2,-10.7) 73(2.6,-10.7) 74(3,-10.7) 75(3.4,-10.7) 76(3.8,-10.7) 77(4.2,-10.7) 78(4.6,-10.7) 79(5,-10.7) 80(5.4,-10.7) 81(5.8,-10.7) 82(6.2,-10.7) 83(6.6,-10.7) 84(7,-10.7) 85(7.4,-10.7) 86(7.8,-10.7) 87(8.2,-10.7) 88(8.6,-10.7) 133(8.6,10.7) 134(8.2,10.7) 135(7.8,10.7) 136(7.4,10.7) 137(7,10.7) 138(6.6,10.7) 139(6.2,10.7) 140(5.8,10.7) 141(5.4,10.7) 142(5,10.7) 143(4.6,10.7) 144(4.2,10.7) 145(3.8,10.7) 146(3.4,10.7) 147(3,10.7) 148(2.6,10.7) 149(2.2,10.7) 150(1.8,10.7) 151(1.4,10.7) 152(1,10.7) 153(0.6,10.7) 154(0.2,10.7) 155(-0.2,10.7) 156(-0.6,10.7) 157(-1,10.7) 158(-1.4,10.7) 159(-1.8,10.7) 160(-2.2,10.7) 161(-2.6,10.7) 162(-3,10.7) 163(-3.4,10.7) 164(-3.8,10.7) 165(-4.2,10.7) 166(-4.6,10.7) 167(-5,10.7) 168(-5.4,10.7) 169(-5.8,10.7) 170(-6.2,10.7) 171(-6.6,10.7) 172(-7,10.7) 173(-7.4,10.7) 174(-7.8,10.7) 175(-8.2,10.7) 176(-8.6,10.7)
  rect 6x6 smd: 177(0,0)
HR911105A
  round 3.251 hole 3.251 unplated: (-5.715,0) (5.715,0)
  round 1.397 hole 0.889: 1(4.45,-6.35) 2(3.18,-8.89) 3(1.91,-6.35) 4(0.64,-8.89) 5(-0.63,-6.35) 6(-1.9,-8.89) 7(-3.17,-6.35) 8(-4.44,-8.89)
  round 1.524 hole 1.016: 9(6.629,4.902) 10(4.089,4.902) 11(-4.089,4.902) 12(-6.629,4.902)
  round 2.032 hole 1.651: N3(-7.747,-3.048) N4(7.747,-3.048)
JTAG_10
  rect 1.1x1.1 hole 0.6: 1(0,0)
  round 1.1 hole 0.6: 2(0,2) 3(2,0) 4(2,2) 5(4,0) 6(4,2) 7(6,0) 8(6,2) 9(8,0) 10(8,2)
LED0805
  rect 1.397x1.143 smd: 1(0,1.079) 2(0,-1.079)
QFN28
  custom 0.95x0.3 smd: 1(-2.4,1.5) 2(-2.4,1) 3(-2.4,0.5) 4(-2.4,0) 5(-2.4,-0.5) 6(-2.4,-1) 7(-2.4,-1.5) 15(2.4,-1.5) 16(2.4,-1) 17(2.4,-0.5) 18(2.4,0) 19(2.4,0.5) 20(2.4,1) 21(2.4,1.5)
  custom 0.3x0.95 smd: 8(-1.5,-2.4) 9(-1,-2.4) 10(-0.5,-2.4) 11(0,-2.4) 12(0.5,-2.4) 13(1,-2.4) 14(1.5,-2.4) 22(1.5,2.4) 23(1,2.4) 24(0.5,2.4) 25(0,2.4) 26(-0.5,2.4) 27(-1,2.4) 28(-1.5,2.4)
  rect 3.35x3.35 smd: 29(0,0)
QFN48
  rect 0.85x0.2 smd: 1(-2.95,2.2) 2(-2.95,1.8) 3(-2.95,1.4) 4(-2.95,1) 5(-2.95,0.6) 6(-2.95,0.2) 7(-2.95,-0.2) 8(-2.95,-0.6) 9(-2.95,-1) 10(-2.95,-1.4) 11(-2.95,-1.8) 12(-2.95,-2.2) 25(2.95,-2.2) 26(2.95,-1.8) 27(2.95,-1.4) 28(2.95,-1) 29(2.95,-0.6) 30(2.95,-0.2) 31(2.95,0.2) 32(2.95,0.6) 33(2.95,1) 34(2.95,1.4) 35(2.95,1.8) 36(2.95,2.2)
  rect 0.2x0.85 smd: 13(-2.2,-2.95) 14(-1.8,-2.95) 15(-1.4,-2.95) 16(-1,-2.95) 17(-0.6,-2.95) 18(-0.2,-2.95) 19(0.2,-2.95) 20(0.6,-2.95) 21(1,-2.95) 22(1.4,-2.95) 23(1.8,-2.95) 24(2.2,-2.95) 37(2.2,2.95) 38(1.8,2.95) 39(1.4,2.95) 40(1,2.95) 41(0.6,2.95) 42(0.2,2.95) 43(-0.2,2.95) 44(-0.6,2.95) 45(-1,2.95) 46(-1.4,2.95) 47(-1.8,2.95) 48(-2.2,2.95)
  rect 4.1x4.1 smd: 49(0,0)
QFN64
  rect 0.8x0.3 smd: 1(-4.5,3.75) 2(-4.5,3.25) 3(-4.5,2.75) 4(-4.5,2.25) 5(-4.5,1.75) 6(-4.5,1.25) 7(-4.5,0.75) 8(-4.5,0.25) 9(-4.5,-0.25) 10(-4.5,-0.75) 11(-4.5,-1.25) 12(-4.5,-1.75) 13(-4.5,-2.25) 14(-4.5,-2.75) 15(-4.5,-3.25) 16(-4.5,-3.75) 33(4.5,-3.75) 34(4.5,-3.25) 35(4.5,-2.75) 36(4.5,-2.25) 37(4.5,-1.75) 38(4.5,-1.25) 39(4.5,-0.75) 40(4.5,-0.25) 41(4.5,0.25) 42(4.5,0.75) 43(4.5,1.25) 44(4.5,1.75) 45(4.5,2.25) 46(4.5,2.75) 47(4.5,3.25) 48(4.5,3.75)
  rect 0.3x0.8 smd: 17(-3.75,-4.5) 18(-3.25,-4.5) 19(-2.75,-4.5) 20(-2.25,-4.5) 21(-1.75,-4.5) 22(-1.25,-4.5) 23(-0.75,-4.5) 24(-0.25,-4.5) 25(0.25,-4.5) 26(0.75,-4.5) 27(1.25,-4.5) 28(1.75,-4.5) 29(2.25,-4.5) 30(2.75,-4.5) 31(3.25,-4.5) 32(3.75,-4.5) 49(3.75,4.5) 50(3.25,4.5) 51(2.75,4.5) 52(2.25,4.5) 53(1.75,4.5) 54(1.25,4.5) 55(0.75,4.5) 56(0.25,4.5) 57(-0.25,4.5) 58(-0.75,4.5) 59(-1.25,4.5) 60(-1.75,4.5) 61(-2.25,4.5) 62(-2.75,4.5) 63(-3.25,4.5) 64(-3.75,4.5)
  rect 7.4x7.4 smd: 65(0,0)
R0603
  rect 0.762x0.762 smd: 1(0,0) 2(1.524,0)
R0805
  rect 1.397x1.143 smd: 1(0,1.079) 2(0,-1.079)
R1206
  rect 1.651x1.27 smd: 1(0,1.397) 2(0,-1.397)
RN0402
  rect 0.65x0.3 smd: 1(-0.55,0.75) 2(-0.55,0.25) 3(-0.55,-0.25) 4(-0.55,-0.75) 5(0.55,-0.75) 6(0.55,-0.25) 7(0.55,0.25) 8(0.55,0.75)
SIP2
  rect 1.6x1.6 hole 1.05: 1(0,0)
  round 1.6 hole 1.05: 2(2.54,0)
SIP3
  rect 1.6x1.6 hole 1.05: 1(0,0)
  round 1.6 hole 1.05: 2(2.54,0) 3(5.08,0)
SIP15X2
  rect 1.6x1.6 hole 1.05: 1(0,0)
  round 1.6 hole 1.05: 2(0,2.54) 3(2.54,0) 4(2.54,2.54) 5(5.08,0) 6(5.08,2.54) 7(7.62,0) 8(7.62,2.54) 9(10.16,0) 10(10.16,2.54) 11(12.7,0) 12(12.7,2.54) 13(15.24,0) 14(15.24,2.54) 15(17.78,0) 16(17.78,2.54) 17(20.32,0) 18(20.32,2.54) 19(22.86,0) 20(22.86,2.54) 21(25.4,0) 22(25.4,2.54) 23(27.94,0) 24(27.94,2.54) 25(30.48,0) 26(30.48,2.54) 27(33.02,0) 28(33.02,2.54) 29(35.56,0) 30(35.56,2.54)
SIP30X2
  rect 1.6x1.6 hole 1.05: 1(0,0)
  round 1.6 hole 1.05: 2(0,2.54) 3(2.54,0) 4(2.54,2.54) 5(5.08,0) 6(5.08,2.54) 7(7.62,0) 8(7.62,2.54) 9(10.16,0) 10(10.16,2.54) 11(12.7,0) 12(12.7,2.54) 13(15.24,0) 14(15.24,2.54) 15(17.78,0) 16(17.78,2.54) 17(20.32,0) 18(20.32,2.54) 19(22.86,0) 20(22.86,2.54) 21(25.4,0) 22(25.4,2.54) 23(27.94,0) 24(27.94,2.54) 25(30.48,0) 26(30.48,2.54) 27(33.02,0) 28(33.02,2.54) 29(35.56,0) 30(35.56,2.54) 31(38.1,0) 32(38.1,2.54) 33(40.64,0) 34(40.64,2.54) 35(43.18,0) 36(43.18,2.54) 37(45.72,0) 38(45.72,2.54) 39(48.26,0) 40(48.26,2.54) 41(50.8,0) 42(50.8,2.54) 43(53.34,0) 44(53.34,2.54) 45(55.88,0) 46(55.88,2.54) 47(58.42,0) 48(58.42,2.54) 49(60.96,0) 50(60.96,2.54) 51(63.5,0) 52(63.5,2.54) 53(66.04,0) 54(66.04,2.54) 55(68.58,0) 56(68.58,2.54) 57(71.12,0) 58(71.12,2.54) 59(73.66,0) 60(73.66,2.54)
SO8
  rect 1.55x0.6 smd: 1(-2.7,1.905) 2(-2.7,0.635) 3(-2.7,-0.635) 4(-2.7,-1.905) 5(2.7,-1.905) 6(2.7,-0.635) 7(2.7,0.635) 8(2.7,1.905)
SOT23-6
  rect 1.1x0.6 smd: 1(-1.3,0.95) 2(-1.3,0) 3(-1.3,-0.95) 4(1.3,-0.95) 5(1.3,0) 6(1.3,0.95)
SW_2P_SMT
  rect 2x2 smd: 1(-4.55,0) 2(4.55,0)
TF_CARD
  round 1.27 hole 1.524 unplated: (-0.35,-3.6) (9.65,-3.6)
  rect 0.7x2 smd: 1(7.7,0) 2(6.6,0) 3(5.5,0) 4(4.4,0) 5(3.3,0) 6(2.2,0) 7(1.1,0) 8(0,0)
  rect 0.85x2 smd: 9(8.95,0) 10(10.1,0)
  rect 1.2x2 smd: 11(-2.65,-8.4) 12(11.95,-8.4)
TH3_0
  round 5 hole 3.048: 1(0,0)
USB_A_F_2X1
  round 1.397 hole 0.914: 1(-3.5,5.326) 2(-0.998,5.326) 3(0.998,5.326) 4(3.5,5.326) 5(-3.5,2.71) 6(-0.998,2.71) 7(0.998,2.71) 8(3.5,2.71)
  round 2.794 hole 2.311: 9(-6.579,5.664) 10(6.579,5.664) 11(-6.579,0) 12(6.579,0)
USB_MICRO_F_SMT
  round 0.55 hole 0.55: (-2,4.3) (2,4.3)
  rect 0.4x1.5 smd: 1(-1.3,5.2) 2(-0.65,5.2) 3(0,5.2) 4(0.65,5.2) 5(1.3,5.2)
  rect 1.9x1.9 smd: 6(-3.95,2.15) 7(3.95,2.15)
WSOP8_208
  oval 1.6x0.6 smd: 1(-3.6,1.905) 2(-3.6,0.635) 3(-3.6,-0.635) 4(-3.6,-1.905) 5(3.6,-1.905) 6(3.6,-0.635) 7(3.6,0.635) 8(3.6,1.905)
XTAL_32KHZ
  round 1.27 hole 0.762: (-0.508,7.163) (3.023,7.163) 1(0,0) 2(2.54,0)

## Nets
GND: BT1.2(-) C3.2 C4.2 C5.2 C6.2 C7.2 C8.2 C9.2 C10.2 C11.2 C12.2 C13.2 C14.2 C15.2 C16.2 C17.2 C18.2 C19.2 C20.2 C21.2 C22.2 C23.2 C24.2 C25.2 C26.2 C27.2 C29.2 C30.2 C31.2 C32.2 C33.2 C34.2 C35.2 C36.2 C37.2 C38.2 C39.2 C40.2 C41.2 C42.2 C47.2 C48.2 C49.2 C50.2 C51.2 C52.2 C53.2 C54.2 C55.2 C56.2 C57.2 C64.2 C65.2 C66.2 C68.2 C69.2 C70.2 C72.2 C76.2 C77.2 C78.2 C79.2 C90.2 C91.2 C92.2 C93.2 C95.2 C96.2 C97.2 C98.2 C99.2 C100.1 C101.1 C102.1 C103.1 C104.1 C105.1 C108.1 C109.1 C110.2 C111.2 C112.2 C113.2 C114.2 C115.1 C116.2 C117.2 C118.2 C119.2 C120.2 C121.2 C122.2 C123.2 C124.2 C125.2 C127.2 C128.2 C129.2 C130.2 C131.2 C132.2 C133.2 C134.2 C135.2 C136.2 C137.2 C138.1 C139.1 C140.2 C143.2 C144.1 C145.2 C147.2 C148.2 C149.2 C151.1 C152.2 C153.2 C155.2 C156.2 C158.1 C159.2 C160.2 C161.1 C162.1 C163.2 C164.1 C165.2 C166.2 C167.2 C168.2 C169.2 C170.1 C171.2 C172.1 C173.2 C174.2 C175.2 D6.2(GND) D7.2(GND) D8.2(GND) D9.2(GND) J2.1 J4.1 J4.3 J4.5 J4.7 J4.11 J4.12 J4.15 J4.16 J5.1 J5.3 J5.5 J7.8 J7.10 J8.3 J10.2 P1.6(VSS) P1.10(CD2) P1.11(SHLD1) P1.12(SHLD2) P4.5(GND) P4.6(SHLD1) P4.7(SHLD2) P5.5(GND) P5.6(SHLD1) P5.7(SHLD2) P7.2(GND1) P7.3(GND2) R22.2 R27.2 R28.1 R29.2 R30.2 R32.2 R45.1 R79.1 R81.1 R82.1 R84.1 R95.1 R99.2 R121.1 R126.2 R127.2 R130.2 R133.2 R135.2 R136.2 SW1.1 SW2.2 SW3.2 SW4.2 SW5.2 SW6.2 SW7.2 U1.79(AGND) U1.177(GND_EP) U2.A1(VSS#A1) U2.A8(VSS#A8) U2.B1(VSS#B1) U2.B2(VSSQ#B2) U2.B8(VSSQ#B8) U2.C9(VSSQ#C9) U2.D1(VSSQ#D1) U2.D8(VSS#D8) U2.D9(VSSQ#D9) U2.F2(VSS#F2) U2.F8(VSS#F8) U2.H2(CS#) U2.J1(VSS#J1) U2.J9(VSS#J9) U2.L1(VSS#L1) U2.L9(VSS#L9) U2.N1(VSS#N1) U2.N9(VSS#N9) U3.A1(VSS#A1) U3.A8(VSS#A8) U3.B1(VSS#B1) U3.B2(VSSQ#B2) U3.B8(VSSQ#B8) U3.C9(VSSQ#C9) U3.D1(VSSQ#D1) U3.D8(VSS#D8) U3.D9(VSSQ#D9) U3.F2(VSS#F2) U3.F8(VSS#F8) U3.H2(CS#) U3.J1(VSS#J1) U3.J9(VSS#J9) U3.L1(VSS#L1) U3.L9(VSS#L9) U3.N1(VSS#N1) U3.N9(VSS#N9) U4.4(GND) U8.6(GND) U9.34(TEST2) U9.44(CLK24_EN) U9.65(VSS) U11.3(GND) U11.29(PAD) U12.4(GND) U13.1(A0) U13.2(A1) U13.4(GND) U13.7(WP) U14.4(N_OE) U14.9(PGND2) U14.16(PGND3) U14.22(AGND) U14.37(TS) U14.46(PGND1) U14.49(GND_EP) U15.2(GND) U16.2(GND)
VBAT: C141.1 C145.1 J10.1 R119.1 U14.38(BAT#38) U14.39(BAT#39) U14.42(BATSENSE)
VBUS_DET: R91.1 U9.11(VBUS_DET)
VCC3V3A_9514: C127.1 C128.1 C129.1 C130.1 C131.1 C132.1 FB8.2 R86.2 R87.2 R88.2 R89.2 R90.2 U9.5(VDD33A1) U9.10(VDD33A2) U9.49(VDD33A7) U9.51(VDD33A3) U9.54(VDD33A4) U9.57(VDD33A5) U9.64(VDD33A6)
VCCA3V_CPU: C164.2 C175.1 R112.2 U1.81(AVCC) U14.12(LDO2) U16.1(EN)
VDD1V2_CPU: C26.1 C27.1 C29.1 C30.1 C31.1 C32.1 C33.1 C34.1 C152.1 C153.1 L3.2 U1.4(VDD1_CPU) U1.9(VDD2_CPU) U1.11(VDD3_CPU) U1.16(VDD4_CPU) U1.156(VDD5_CPU) U1.164(VDD6_CPU) U1.169(VDD7_CPU) U1.173(VDD8_CPU) U14.10(DCDC2)
VDD1V2_INT: C20.1 C21.1 C22.1 C23.1 C24.1 C25.1 C159.1 C160.1 L4.2 U1.35(VDD1_INT) U1.73(VDD2_INT) U1.98(VDD3_INT) U1.109(VDD4_INT) U1.149(VDD5_INT) U14.17(DCDC3)
VDD1V5: C2.1 C14.1 C15.1 C16.1 C17.1 C18.1 C19.1 C46.1 C49.1 C50.1 C51.1 C52.1 C53.1 C54.1 C55.1 C56.1 C57.1 C64.1 C65.1 C66.1 C69.1 C70.1 C72.1 C76.1 C77.1 C78.1 C79.1 C163.1 C166.1 C168.1 L5.2 R24.1 R31.1 R132.2 U1.23(VCC1_DRAM) U1.30(VCC2_DRAM) U1.43(VCC3_DRAM) U1.53(VCC4_DRAM) U1.62(VCC5_DRAM) U2.A2(VDD#A2) U2.A9(VDD#A9) U2.B9(VDDQ#B9) U2.C1(VDDQ#C1) U2.D7(VDD#D7) U2.E2(VDDQ#E2) U2.E9(VDDQ#E9) U2.G2(VDD#G2) U2.G8(VDD#G8) U2.K1(VDD#K1) U2.K9(VDD#K9) U2.M1(VDD#M1) U2.M9(VDD#M9) U3.A2(VDD#A2) U3.A9(VDD#A9) U3.B9(VDDQ#B9) U3.C1(VDDQ#C1) U3.D7(VDD#D7) U3.E2(VDDQ#E2) U3.E9(VDDQ#E9) U3.G2(VDD#G2) U3.G8(VDD#G8) U3.K1(VDD#K1) U3.K9(VDD#K9) U3.M1(VDD#M1) U3.M9(VDD#M9)
VDD1V8: C116.1 C117.1 C118.1 U9.15(VDD18CORE1) U9.38(VDD18CORE2)
VDD3V3: C35.1 C36.1 C37.1 C38.1 C39.1 C40.1 C41.1 C48.1 C68.1 C119.1 C120.1 C121.1 C122.1 C123.1 C124.1 C125.1 C137.1 C149.1 C155.1 C156.1 C165.1 C167.1 FB8.1 J3.9 J3.12 J4.6 J4.8 J5.4 J7.1 J7.2 L2.2 LD2.1(ANODE) LD3.1(ANODE) P1.4(VDD) R1.2 R2.2 R3.2 R4.2 R33.2 R34.2 R39.2 R40.2 R41.2 R42.2 R43.2 R44.2 R77.2 R78.2 R80.2 R83.2 R91.2 R96.2 R97.2 R98.2 R100.2 R101.2 R102.2 R103.2 R104.2 R120.2 R123.1 R149.1 R150.1 U1.5(VCC1) U1.76(V33_HP) U1.97(V33_USB) U1.100(VCC2) U1.142(VCC3) U1.163(VCC4) U4.8(VCC) U9.19(VDD33IO1) U9.27(VDD33IO2) U9.28(NTRST) U9.29(TMS) U9.30(TDI) U9.32(TCK) U9.33(VDD33IO3) U9.39(VDD33IO4) U9.40(TEST3) U9.46(VDD33IO5) U13.8(VCC) U16.4(IN)
VDD5V: C98.1 C99.1 C134.1 C135.1 C136.1 C147.1 C148.1 D8.5(VCC) D9.5(VCC) FB9.2 FB10.2 J4.2 J4.4 J5.2 P7.1(VCC) R105.2 R118.1 U8.7(IN) U11.7(REGIN) U11.8(VBUS) U12.8(VCC) U14.31(VBUS) U14.32(ACIN#32) U14.33(ACIN#33) U15.4(IN)
AXP209_CHGLED: R134.2 U14.36(CHGLED)
AXP209_EXTEN: R129.2 U15.1(EN)
AXP209_INT#: R26.2 R150.2 U14.48(IRQ/WAKEUP)
AXP209_POWON: C174.1 SW9.2 U14.47(PWRON)
AXP209_PWROK: R25.2 U14.25(PWROK)
AXP209_VBUSEN#: R123.2 R127.1 U14.6(N_VBUSEN)
AXP209_VINT: C171.1 U14.26(VINT) U14.27(LDO1SET)
AXP209_VREF: C173.1 U14.24(VREF)
CP_RST#: R104.1 U11.9(RST)
CPU_RST#: C6.1 R25.1 R149.2 SW1.2 U1.159(RESET_N)
CTS: R103.1 U11.23(CTS)
DCD: R101.1 U11.1(DCD)
DDR_A0: R140.4 U2.K3(A0) U3.K3(A0)
DDR_A1: R138.2(4) U2.L7(A1) U3.L7(A1)
DDR_A2: R141.2(4) U2.L3(A2) U3.L3(A2)
DDR_A3: R141.1(4) U2.K2(A3) U3.K2(A3)
DDR_A4: R138.1(4) U2.L8(A4) U3.L8(A4)
DDR_A5: R141.3(4) U2.L2(A5) U3.L2(A5)
DDR_A6: R138.3(4) U2.M8(A6) U3.M8(A6)
DDR_A7: R142.3(4) U2.M2(A7) U3.M2(A7)
DDR_A8: R138.4 U2.N8(A8) U3.N8(A8)
DDR_A9: R142.1(4) U2.M3(A9) U3.M3(A9)
DDR_A10: R137.2(4) U2.H7(A10/AP) U3.H7(A10/AP)
DDR_A11: R139.1(4) U2.M7(A11) U3.M7(A11)
DDR_A12: R137.4 U2.K7(A12/BC#) U3.K7(A12/BC#)
DDR_A13: R141.4 U2.N3(A13) U3.N3(A13)
DDR_A14: R139.2(4) U2.N7(A14) U3.N7(A14)
DDR_BA0: R140.3(4) U2.J2(BA0) U3.J2(BA0)
DDR_BA1: R137.3(4) U2.K8(BA1) U3.K8(BA1)
DDR_BA2: R140.2(4) U2.J3(BA2) U3.J3(BA2)
DDR_CAS: R139.4 U2.G3(CAS#) U3.G3(CAS#)
DDR_CK_N: R16.1 U2.G7(CK_N) U3.G7(CK_N)
DDR_CK_P: R14.1 U2.F7(CK_P) U3.F7(CK_P)
DDR_CKE: R137.1(4) U2.G9(CKE) U3.G9(CKE)
DDR_D0: R146.8(5) U2.E3(DQ4)
DDR_D1: R143.5 U2.E7(DQ7)
DDR_D2: R146.7(5) U2.D2(DQ6)
DDR_D3: R143.6(5) U2.C7(DQ1)
DDR_D4: R146.5 U2.C2(DQ2)
DDR_D5: R143.8(5) U2.C8(DQ3)
DDR_D6: R146.6(5) U2.B3(DQ0)
DDR_D7: R143.7(5) U2.E8(DQ5)
DDR_D8: R144.6(5) U3.E8(DQ5)
DDR_D9: R145.6(5) U3.C2(DQ2)
DDR_D10: R144.8(5) U3.C8(DQ3)
DDR_D11: R145.5 U3.D2(DQ6)
DDR_D12: R144.5 U3.E7(DQ7)
DDR_D13: R145.7(5) U3.B3(DQ0)
DDR_D14: R144.7(5) U3.C7(DQ1)
DDR_D15: R145.8(5) U3.E3(DQ4)
DDR_DM0: R20.2 U2.B7(DM/TDQS_P)
DDR_DM1: R21.2 U3.B7(DM/TDQS_P)
DDR_DQS0_N: R17.2 U2.D3(DQS_N)
DDR_DQS0_P: R15.2 U2.C3(DQS_P)
DDR_DQS1_N: R19.2 U3.D3(DQS_N)
DDR_DQS1_P: R18.2 U3.C3(DQS_P)
DDR_ODT: R142.4 U2.G1(ODT) U3.G1(ODT)
DDR_RAS: R139.3(4) U2.F3(RAS#) U3.F3(RAS#)
DDR_RST: R142.2(4) U2.N2(RESET#) U3.N2(RESET#)
DDR_VREF: C42.1 C46.2 C47.1 R31.2 R32.1 U2.E1(VREFDQ) U2.J8(VREFCA) U3.E1(VREFDQ) U3.J8(VREFCA)
DDR_WE: R140.1(4) U2.H3(WE#) U3.H3(WE#)
DDRA0: R140.5 U1.64(DDR3_A0)
DDRA1: R138.7(5) U1.52(DDR3_A1)
DDRA2: R141.7(5) U1.66(DDR3_A2)
DDRA3: R141.8(5) U1.65(DDR3_A3)
DDRA4: R138.8(5) U1.51(DDR3_A4)
DDRA5: R141.6(5) U1.67(DDR3_A5)
DDRA6: R138.6(5) U1.54(DDR3_A6)
DDRA7: R142.6(5) U1.71(DDR3_A7)
DDRA8: R138.5 U1.55(DDR3_A8)
DDRA9: R142.8(5) U1.69(DDR3_A9)
DDRA10: R137.7(5) U1.48(DDR3_A10)
DDRA11: R139.8(5) U1.56(DDR3_A11)
DDRA12: R137.5 U1.50(DDR3_A12)
DDRA13: R141.5 U1.68(DDR3_A13)
DDRA14: R139.7(5) U1.57(DDR3_A14)
DDRBA0: R140.6(5) U1.63(DDR3_BA0)
DDRBA1: R137.6(5) U1.49(DDR3_BA1)
DDRBA2: R140.7(5) U1.61(DDR3_BA2)
DDRCAS: R139.5 U1.59(DDR3_CAS)
DDRCK_N: R16.2 U1.46(DDR3_CK_N)
DDRCK_P: R14.2 U1.45(DDR3_CK_P)
DDRCKE: R137.8(5) U1.47(DDR3_CKE)
DDRD0: R146.1(4) U1.22(DDR3_D0)
DDRD1: R143.4 U1.40(DDR3_D1)
DDRD2: R146.2(4) U1.21(DDR3_D2)
DDRD3: R143.3(4) U1.41(DDR3_D3)
DDRD4: R146.4 U1.19(DDR3_D4)
DDRD5: R143.1(4) U1.44(DDR3_D5)
DDRD6: R146.3(4) U1.20(DDR3_D6)
DDRD7: R143.2(4) U1.42(DDR3_D7)
DDRD8: R144.3(4) U1.37(DDR3_D8)
DDRD9: R145.3(4) U1.25(DDR3_D9)
DDRD10: R144.1(4) U1.39(DDR3_D10)
DDRD11: R145.4 U1.24(DDR3_D11)
DDRD12: R144.4 U1.36(DDR3_D12)
DDRD13: R145.2(4) U1.26(DDR3_D13)
DDRD14: R144.2(4) U1.38(DDR3_D14)
DDRD15: R145.1(4) U1.27(DDR3_D15)
DDRDM0: R20.1 U1.29(DDR3_DM0)
DDRDM1: R21.1 U1.28(DDR3_DM1)
DDRDQS0_N: R17.1 U1.32(DDR3_DQS0_N)
DDRDQS0_P: R15.1 U1.31(DDR3_DQS0_P)
DDRDQS1_N: R19.1 U1.34(DDR3_DQS1_N)
DDRDQS1_P: R18.1 U1.33(DDR3_DQS1_P)
DDRODT: R142.5 U1.72(DDR3_ODT)
DDRRAS: R139.6(5) U1.58(DDR3_RAS)
DDRRST: R142.7(5) U1.70(DDR3_RST)
DDRWE: R140.8(5) U1.60(DDR3_WE)
DSR: R102.1 U11.27(DSR)
EINT1: J4.42 U1.154(PG1/EINT1)
EINT2: J4.41 U1.153(PG2/EINT2)
HPBP: C12.1 C13.1 U1.75(HPBP)
HPCOM: J1.1 R64.1 U1.77(HPCOM)
HPOUTL: J1.4 R63.1 U1.74(HPOUTL)
HPOUTR: J1.2 R62.1 U1.78(HPOUTR)
I2C0_SCL: R2.1 R122.2 U1.101(PB0/TWI0_SCK)
I2C0_SDA: R1.1 R125.2 U1.102(PB1/TWI0_SDA)
LAN9154_ETHPLL: C102.2 FB6.1 U9.48(VDD18ETHPLL1)
LAN9154_USBPLL: C103.2 FB6.2 U9.62(VDD18USBPLL2)
LAN9514_RESET: C108.2 R83.1 R84.2 R85.1 U9.12(RESET#)
LAN9514_XI: C109.2 R92.2 U9.61(XI) Y2.1
LAN9514_XO: C115.2 R92.1 U9.60(XO) Y2.2
LCD_CLK: J5.28 U1.129(PD24/LCD_CLK)
LCD_D2: J5.10 U1.148(PD2/LCD_D2)
LCD_D3: J5.9 U1.147(PD3/LCD_D3)
LCD_D4: J5.12 U1.146(PD4/LCD_D4)
LCD_D5: J5.11 U1.145(PD5/LCD_D5)
LCD_D6: J5.14 U1.144(PD6/LCD_D6)
LCD_D7: J5.13 U1.143(PD7/LCD_D7)
LCD_D10: J5.16 U1.141(PD10/LCD_D10)
LCD_D11: J5.15 U1.140(PD11/LCD_D11)
LCD_D12: J5.18 U1.139(PD12/LCD_D12)
LCD_D13: J5.17 U1.138(PD13/LCD_D13)
LCD_D14: J5.20 U1.137(PD14/LCD_D14)
LCD_D15: J5.19 U1.136(PD15/LCD_D15)
LCD_D18: J5.22 U1.135(PD18/LCD_D18)
LCD_D19: J5.21 U1.134(PD19/LCD_D19)
LCD_D20: J5.24 U1.133(PD20/LCD_D20)
LCD_D21: J5.23 U1.132(PD21/LCD_D21)
LCD_D22: J5.26 U1.131(PD22/LCD_D22)
LCD_D23: J5.25 U1.130(PD23/LCD_D23)
LCD_DE: J5.27 U1.128(PD25/LCD_DE)
LCD_HSYNC: J5.30 U1.127(PD26/LCD_HSYNC)
LCD_VSYNC: J5.29 U1.126(PD27/LCD_VSYNC)
LRADC: C93.1 R112.1 R113.1 SW2.1 U1.86(LRADC)
MDI_RXN: C113.1 J3.6(RD-) R89.1 U9.53(RXN)
MDI_RXP: C112.1 J3.3(RD+) R88.1 U9.52(RXP)
MDI_TXN: C111.1 J3.2(TD-) R87.1 U9.56(TXN)
MDI_TXP: C110.1 J3.1(TD+) R86.1 U9.55(TXP)
MICIN: C94.2 U1.84(MICIN1)
NLINKA_LED: R93.1 U9.21(LNKA_LED#/GPIO1)
NMI#: R26.1 U1.158(NMI_N)
NSPD_LED: R94.1 U9.22(SPD_LED#/GPIO2)
PB2: J4.17 U1.103(PB2/PWM/SPI2_MOSI/EINT16)
PB3: J4.21 U1.150(PB3/IR_TX/SPI2_MISO/EINT17)
PB4: J4.18 U1.104(PB4/IR_RX/EINT18)
PB10: J4.22 U1.10(PB10/SPI2_CS1/EINT24)
PB15: J4.19 U1.105(PB15/TWI1_SCK)
PB16: J4.20 U1.106(PB16/TWI1_SDA)
PB17: J4.24 J5.6 R4.1 R106.2 R107.2 U1.161(PB17/TWI2_SCK)
PB18: J4.23 J5.8 R3.1 R108.2 R109.2 U1.160(PB18/TWI2_SDA)
PC0: J4.60 R38.2 U1.8(PC0/NWE/SPI0_MOSI)
PC1: J4.59 R37.2 U1.7(PC1/NALE/SPI0_MISO)
PC2: J4.58 R36.1 U1.6(PC2/NCLE/SPI0_CLK)
PC3: J4.57 R35.1 U1.3(PC3/NCE1/SPI0_CS0)
PC4: J4.56 U1.2(PC4/NCE0)
PC5: J4.55 U1.1(PC5/NRE)
PC12: J4.48 U1.168(PC12/NDQ4/SDC2_D4)
PC13: J4.47 U1.167(PC13/NDQ5/SDC2_D5)
PC14: J4.46 U1.166(PC14/NDQ6/SDC2_D6)
PC15: J4.45 U1.165(PC15/NDQ7/SDC2_D7)
PC19: J4.43 U1.162(PC19/NDQS)
PE0: J4.30 U1.114(PE0/CSI_PCLK/SPI2_CS0/EINT14)
PE1: J4.29 U1.115(PE1/CSI_MCLK/SPI2_CLK/EINT15)
PE2: J4.28 U1.116(PE2/CSI_HSYNC/SPI2_MOSI)
PE3: J4.27 U1.117(PE3/CSI_VSYNC/SPI2_MISO)
PE4: J4.50 U1.118(PE4/CSI_D0/SDC2_D0)
PE5: J4.49 U1.119(PE5/CSI_D1/SDC2_D1)
PE6: J4.52 U1.120(PE6/CSI_D2/SDC2_D2)
PE7: J4.51 U1.121(PE7/CSI_D3/SDC2_D3)
PE8: J4.54 U1.122(PE8/CSI_D4/SDC2_CMD)
PE9: J4.53 U1.123(PE9/CSI_D5/SDC2_CLK)
PE10: J4.26 U1.124(PE10/CSI_D6/UART1_TX)
PE11: J4.25 U1.125(PE11/CSI_D7/UART1_RX)
PF0: J4.36 J7.7 R97.1 U1.107(PF0/SDC0_D1/JTAG_TMS)
PF1: J4.35 J7.5 R98.1 U1.108(PF1/SDC0_D0/JTAG_TDI)
PF2: J4.34 U1.110(PF2/SDC0_CLK/UART0_TX)
PF3: J4.33 J7.6 U1.111(PF3/SDC0_CMD/JTAG_TDO)
PF4: J4.32 U1.112(PF4/SDC0_D3/UART0_RX)
PF5: J4.31 J7.9 R96.1 R99.1 U1.113(PF5/SDC0_D2/JTAG_TCK)
PG9: R110.2 U1.12(PG9/SPI1_CS0/UART3_TX/EINT9)
PG10: R111.2 U1.13(PG10/SPI1_CLK/UART3_RX/EINT10)
PG11: J5.7 U1.14(PG11/SPI1_MOSI/UART3_CTS/EINT11)
PG12: R85.2 U1.15(PG12/SPI1_MISO/UART3_RTS/EINT12)
PTRCTL2: R77.1 U8.1(ENA) U8.2(FLGA) U9.14(PRTCTL2)
PTRCTL3: R78.1 U8.3(FLAGB) U8.4(ENB) U9.16(PRTCTL3)
RI: R100.1 U11.2(RI)
SD_DETECT: P1.9(CD1) R44.1 U1.155(PG0/EINT0)
SDC2_CLK: P1.5(CLK) R40.1 U1.175(PC7/NRB1/SDC2_CLK)
SDC2_CMD: P1.3(CMD) R39.1 U1.176(PC6/NRB0/SDC2_CMD)
SDC2_D0: P1.7(DAT0) R41.1 U1.174(PC8/NDQ0/SDC2_D0)
SDC2_D1: P1.8(DAT1) R42.1 U1.172(PC9/NDQ1/SDC2_D1)
SDC2_D2: P1.1(DAT2) R43.1 U1.171(PC10/NDQ2/SDC2_D2)
SDC2_D3: P1.2(DAT3) R45.2 U1.170(PC11/NDQ3/SDC2_D3)
SVREF: C2.2 C4.1 R24.2 R27.1 U1.18(SVREF)
TPX1: J4.38 U1.89(TPX1_ADC12)
TPX2: J4.40 U1.87(TPX2_ADC12)
TPY1: J4.37 U1.90(TPY1_ADC12)
TPY2: J4.39 U1.88(TPY2_ADC12)
UART1_RX: J8.2 U1.151(PG4/UART1_RX/EINT4) U11.26(TXD/OUT)
UART1_TX: J8.1 U1.152(PG3/UART1_TX/EINT3) U11.25(RXD/IN)
UBOOT: R117.2 SW7.1 U1.157(UBOOT)
USB2_PWR: D6.5(VCC) FB7.2 P3.1(VDD1)
USB3_PWR: D7.5(VCC) FB5.2 P3.5(VDD)
USB_COM_DM: D8.3(IO2) P4.2(D-) U11.5(DM)
USB_COM_DP: D8.1(IO1) P4.3(D+) U11.4(DP)
USB_DM2: D6.3(IO2) P3.2(D-1) U9.1(USBDM2)
USB_DM3: D7.3(IO2) P3.6(D-) U9.3(USBDM3)
USB_DM4: J4.9 U9.6(USBDM4)
USB_DM5: J4.13 U9.8(USBDM5)
USB_DP2: D6.1(IO1) P3.3(D+1) U9.2(USBDP2)
USB_DP3: D7.1(IO1) P3.7(D+) U9.4(USBDP3)
USB_DP4: J4.10 U9.7(USBDP4)
USB_DP5: J4.14 U9.9(USBDP5)
USB_DS_DM: D9.4(IO3) P5.2(D-) R147.1
USB_DS_DP: D9.6(IO4) P5.3(D+) R148.1
USB_HOST_DM: U1.95(UDM1) U9.58(USBDM0)
USB_HOST_DP: U1.96(UDP1) U9.59(USBDP0)
USB_OTG_DM: R147.2 U1.93(UDM0)
USB_OTG_DP: R148.2 U1.94(UDP0)
VIPSOUT: C144.2 C151.2 C158.2 C161.2 C169.1 LD4.1(ANODE) LD5.1(ANODE) U14.7(VIN2) U14.13(LDO24IN) U14.14(VIN3) U14.21(APS) U14.34(IPSOUT#34) U14.35(IPSOUT#35) U14.40(LDO3IN) U14.44(VIN1)
VMIC: C97.1 R70.1 U1.85(VMIC)
VRA1: C11.1 U1.83(VRA1)
VRA2: C9.1 C10.1 R28.2 U1.82(VRA2)
VRP: C7.1 C8.1 U1.80(VRP)
VRTC_BAT: BT1.1(+) U12.3(VBAT)
N503397: R79.2 U9.63(USBRBIAS)
N509011: R81.2 U9.50(EXRES)
N517034: C114.1 J3.4 J3.5 R90.1
N522155: J3.11 R94.2
N526028: J3.10 R93.2
N746922: R106.1 U12.6(SCL)
N746926: R108.1 U12.5(SDA)
N747154: C139.2 U12.2(X2) Y3.1
N747206: C138.2 U12.1(X1) Y3.2
N747502: LD3.2(CATHODE) R111.1
N747536: LD2.2(CATHODE) R110.1
N747940: R105.1 U12.7(OUT)
N756260: R35.2 U4.1(C\S\)
N756264: R36.2 U4.6(CLK)
N756292: R37.1 U4.2(DO/IO1)
N756296: R38.1 U4.5(DI/IO0)
N756448: R33.1 U4.3(W\P\/IO2)
N756452: R34.1 U4.7(H\O\L\D\/IO3)
N757560: C3.1 U1.92(X24MIN) Y1.1
N757568: C5.1 U1.91(X24MOUT) Y1.2
N763213: C140.1 R118.2
N764072: R122.1 U14.2(SCK)
N764092: R125.1 U14.1(SDA)
N767076: R130.1 U14.23(BIAS)
N768578: LD4.2(CATHODE) R134.1
N768849: R22.1 U1.17(DZQ)
N771720: L1.1 U14.45(LX1)
N771737: C141.2 C143.1 L1.2 R119.2 U14.43(CHSENSE)
N775597: L3.1 U14.8(LX2)
N776415: L4.1 U14.15(LX3)
N777454: C162.2 U14.28(LDO1)
N777532: C170.2 U14.41(LDO3)
N777536: C172.2 U14.11(LDO4)
N779538: LD5.2(CATHODE) R135.1
N782893: R132.1 R133.1 U16.6(FB)
N786635: R29.1 U2.H8(ZQ)
N793634: R30.1 U3.H8(ZQ)
N794701: R80.1 R82.2 U9.41(AUTOMDIX_EN)
N804374: C100.2 C101.2 FB5.1 U8.8(OUTA)
N804384: C104.2 C105.2 FB7.1 U8.5(OUTB)
N836856: P3.4(GND1) P3.8(GND) P3.9 P3.10 P3.11 P3.12 R121.2
N842148: J3.8(GND) J3.N3 J3.N4 R95.2
N873165: R113.2 R114.1 SW3.1
N873197: R114.2 R115.1 SW4.1
N873229: R115.2 R116.1 SW5.1
N873261: R116.2 R117.1 SW6.1
N938713: R107.1 U13.6(SCL)
N938717: R109.1 U13.5(SDA)
N962797: C133.1 U11.6(VDD)
N965686: FB9.1 P4.1(VCC)
N1015946: R129.1 U14.20(EXTEN)
N1048158: FB10.1 P5.1(VCC)
N1125465: C94.1 C95.1 J2.3 J2.5 R69.2
N1125489: C90.1 R62.2
N1125509: C91.1 R63.2
N1125541: C92.1 R64.2
N1125661: C96.1 R69.1 R70.2
N1163804: L5.1 U16.3(LX)
N1310359: R120.1 R126.1 U15.6(FB)
N1310535: L2.1 U15.3(LX)
N1355921: R136.1 SW9.1

Pads without a net: D6 4 6; D7 4 6; D8 4 6; D9 1 3; J1 3 5; J2 2 4; J3 7; J4 44; J7 3 4; P4 4; P5 4; TH1 1; TH2 1; TH3 1; TH4 1; U1 99; U2 A3 A7 F1 F9 H1 H9 J7; U3 A3 A7 F1 F9 H1 H9 J7; U9 13 17 18 20 23 24 25 26 31 35 36 37 42 43 45 47; U11 10 11 12 13 14 15 16 17 18 19 20 21 22 24 28; U13 3; U14 3 5 18 19 29 30; U15 5; U16 5

## Via types
v1: diameter 0.457, hole 0.254, TOP to BOTTOM, 748 vias

## Routing (per net, layer and track width the routed paths; a pad name or vN(x,y) marks a point on that pad's centre or on a via; arc(x,y) is an arc through that point)
GND: length 275.1
  TOP w0.127: U3.F8 59.43,21.5 59.04,21.11 v1(58.37,21.11)
  TOP w0.203: U14.46 19.94,74.04 v1(20.07,74.17) ; R79.1 v1(69.7,76.78) ; v1(73.41,90.04) 73.41,90.11 72.33,89.03 C108.1 ; v1(17.68,78.33) 18.14,78.33 18.34,78.13 18.34,78.06 18.44,77.97 U14.37 ; R81.1 v1(56.03,73.05) ; C104.1 73.71,78.08 v1(73.53,77.9) ; U14.9 22.39,73.95 v1(22.61,74.17) ; C143.2 v1(9.42,75.49) ; U14.16 22.39,74.44 U14.49 20.39,74.44 U14.4 ; U14.22 22.74,76.84 v1(22.61,76.71) ; U4.4 v1(11.56,21.59) ; C145.2 v1(16.64,81.71) ; v1(78.82,61.72) R121.1 v1(79.93,62.84)
  TOP w0.254: U3.N9 61.09,15.29 v1(61.09,15.24) ; U2.J1 v1(37.7,19.1) ; U13.2 v1(20.96,17.37) ; C47.2 v1(32.36,18.29) ; v1(90.81,89.15) 90.68,89.03 C133.2 ; C115.1 v1(68.71,72.14) ; U2.D8 v1(44.33,23.5) ; U3.A1 v1(53.54,26.04) ; C95.2 v1(77.72,8.99) ; U3.N1 v1(53.68,15.5) ; C79.2 v1(51.28,18.54) ; R127.2 19.93,67.56 v1(19.94,67.56) ; v1(51.23,15.47) 51.23,15.35 50.86,14.99 C53.2 ; P4.6 v1(95.2,81.58) ; SW3.2 v1(77.7,4.42) ; U3.D1 v1(53.45,23.1) ; 33.53,16.76 v1(32.54,16.76) ; C102.1 v1(52.32,80.01) ; v1(61.59,17.4) 61.49,17.5 U3.L9 ; U2.N1 v1(37.93,15.5) ; C171.2 23.11,83.38 v1(22.1,84.39) ; C66.2 v1(51.71,11.23) ; U2.C9 v1(45.36,23.9) ; C68.2 v1(18.54,27.05) ; P1.6 v1(87.34,32.81) ; C78.2 v1(51.23,26.92) ; v1(27.18,86.99) 27.38,86.99 27.69,87.3 D9.2 ; C105.1 v1(73.71,81.86) ; SW7.2 v1(30.71,4.3) ; C57.2 v1(51.28,23.37) ; P5.6 v1(32.76,96.91) ; U3.L1 v1(53.45,17.5) ; P4.5 v1(92.24,86.83) ; U2.N9 v1(45.13,15.5) ; C97.2 v1(73.48,8.28) ; C96.2 v1(75.69,8.48) ; U2.J9 v1(45.36,19.1) ; v1(76.97,67.82) 77.34,68.19 D6.2 ; U9.34 57.33,86.87 56.77,86.31 v1(56.77,86.11) ; C100.1 v1(78.94,77.9) ; U1.79 v1(58.21,52.62) ; C116.2 v1(51.97,84.86) ; U2.F8 v1(44.33,21.1) ; R29.2 50.77,20.07 v1(51.27,19.57) ; v1(61.34,19.43) 61.01,19.1 U3.J9 ; U8.6 75.82,84.38 v1(76.4,84.96) ; C109.1 v1(71.63,72.14) ; C4.2 v1(32.41,26.16) ; 62.77,85.16 62.78,85.16 v1(62.78,85.17) ; C174.2 v1(7.14,66.9) ; C42.2 v1(47.24,21.59) ; U3.C9 v1(61.11,23.9) ; v1(20.96,24.38) 20.45,23.88 SW1.1 ; C56.2 v1(47.37,25.15) ; U3.D9 v1(61.11,23.1) ; U2.D9 v1(45.36,23.1) 45.37,23.1 ; U9.44 v1(56.82,81.87) ; U11.3 85.22,87.13 v1(84.58,86.49) ; SW4.2 v1(66.02,4.47) ; U2.B2 v1(38.73,25.1) ; U3.B8 v1(60.08,25.1) ; U2.A1 v1(37.7,25.5) ; SW2.2 v1(89.39,4.93) ; U2.H2 v1(39.53,19.5) ; C5.2 v1(62.86,64.9) ; C173.2 v1(25.65,84.07) ; P1.12 v1(95.77,42.56) ; SW5.2 v1(54.33,4.42) ; P1.10 v1(87.63,40.71) ; U2.L9 v1(45.36,17.5) ; C164.1 v1(30.23,71.5) ; P5.7 v1(21.6,96.91) ; SW6.2 v1(42.65,4.3) ; U13.4 v1(20.85,14.83) ; U13.1 v1(20.93,18.64) ; U3.B2 v1(54.48,25.1) ; C101.1 78.94,81.71 v1(79.02,81.79) ; v1(11.43,12.45) 12.7,12.45 ; R84.1 v1(73.66,87.12) ; C3.2 v1(55.75,64.9) ; C50.2 v1(47.19,16.76) ; U3.H2 v1(55.28,20.3) ; U2.B1 v1(37.7,24.7) ; R133.2 v1(11.18,9.53) ; P1.11 v1(95.74,27.96) ; U2.F2 v1(38.73,21.9) ; C137.2 v1(29.08,17.4) ; C35.2 v1(52.22,82.14) ; U3.F2 v1(55.28,21.9) ; U2.D1 v1(37.7,23.1) ; U2.L1 v1(37.7,17.5) ; U3.J1 v1(53.45,19.1) ; C72.2 v1(32.39,15.24) ; P4.7 v1(96.75,91.03) ; U2.A8 v1(44.33,25.9) ; U2.B8 v1(44.33,25.1) ; U3.D8 v1(60.08,23.5) ; U3.B1 53.63,25.15 v1(53.34,25.15) ; v1(11.05,14.1) 11.43,14.48 C165.2 ; U3.A8 v1(60.08,25.9) ; R136.2 v1(8.26,60.71) ; 33.53,27.69 v1(32.61,27.69) ; C55.2 v1(47.24,11.23) ; U13.7 v1(23.52,17.37)
  TOP w0.305: 13.72,27.3 v1(13.72,28.45) ; C136.2 v1(11.43,45.85)
  TOP w0.381: BT1.2 26.46,48.64 27.18,47.93 v1(27.18,45.72) ; v1(16.89,40.89) 16.38,41.4 U12.4
  BOTTOM w0.203: C119.2 v1(77.74,30.3) ; C27.2 v1(43.56,42.8) ; v1(20.24,68.02) 19.71,68.55 C144.1 ; C170.1 v1(13.92,79.15) ; C128.2 v1(62.86,81.91) ; v1(63.88,86.83) 64.22,86.49 C118.2 ; C29.2 v1(43.56,44.58) ; C130.2 v1(64.14,82.55) ; v1(24.51,79.76) 23.69,78.93 C161.1 ; C122.2 55.88,87.92 56.35,88.39 v1(56.52,88.39) ; C19.2 v1(55.75,41.43) ; C103.1 v1(65.66,80.77) ; C16.2 v1(55.63,46.28) ; C14.2 v1(62.12,31.17) ; v1(87.58,43.36) R95.1 v1(86.49,42.29) ; C132.2 v1(61.09,81.91) ; C131.2 59.31,81.79 v1(59.56,82.04) ; C93.2 v1(67.34,7.72) ; R22.2 v1(44.6,33.99)
  BOTTOM w0.254: C124.2 v1(66.67,89.28) ; C138.1 v1(11.3,35.31) ; R30.2 62.94,17.88 v1(62.84,17.78) ; C40.2 43.43,52.58 v1(43.69,52.83) ; C6.2 v1(21.84,25.53) ; v1(44.58,42.29) 44.32,42.04 C32.2 ; C125.2 62.79,85.19 v1(62.78,85.17) ; C9.2 v1(69.02,57.85) ; 55.37,51.31 v1(54.36,51.31) ; C76.2 40.49,27.15 v1(40.34,27) ; C113.2 v1(74.8,56.77) ; v1(29.97,70.1) 29.72,70.36 C172.1 ; v1(58.04,52.07) 58.2,51.91 58.37,51.91 58.65,51.63 58.65,51.56 C175.2 ; C117.2 v1(54.25,86.08) ; C26.2 v1(50.67,43.43) ; C7.2 69.47,52.58 v1(69.85,52.2) ; v1(43.69,50.04) 43.43,49.78 C21.2 ; v1(64.02,84.06) 64.27,84.3 C127.2 ; C10.2 v1(64.26,58.55) ; C92.2 v1(76.84,26.87) ; C31.2 v1(36.7,38.48) ; v1(52.2,45.47) 52.32,45.59 C20.2 ; v1(24.38,84.2) 24,83.82 C162.1 ; v1(57.4,59.69) 57.4,59.44 56.64,58.67 ; R28.1 65.91,58.04 v1(65.66,58.29) ; C22.2 v1(53.85,42.16) ; C51.2 v1(66.19,24.74) ; C17.2 v1(51.94,42.29) ; C112.2 v1(77.09,51.44) ; C65.2 v1(55.52,34.24) ; v1(39.5,10.41) 40.51,11.43 C69.2 ; v1(87.5,91.82) 87.88,91.44 C135.2 ; R135.2 v1(25.78,88.54) ; C77.2 58.49,26.35 v1(58.49,26.63) ; v1(76.96,19.94) 76.71,19.68 C90.2 ; C24.2 55.63,55.63 v1(54.86,54.86) ; C39.2 37.08,45.97 v1(36.7,46.36) ; C139.1 v1(15.37,35.31) ; v1(80.12,74.55) 79.88,74.31 D7.2 ; C123.2 v1(59.33,85.24) ; v1(66.29,48.49) 65.81,48.49 65.78,48.51 C13.2 ; R126.2 v1(18.29,57.91) ; R99.2 49.78,90.3 50.67,91.19 v1(50.67,91.57) ; v1(51.69,56.77) 50.8,57.66 C41.2 ; v1(39.12,36.45) 39.12,36.64 39.43,36.96 C38.2 ; C11.2 v1(63.06,57.72) ; v1(89.79,90.17) 89.79,89.71 89.61,89.53 C134.2 ; C34.2 v1(44.2,46.86) ; v1(63.55,42.09) 63.35,42.29 C64.2 ; C120.2 v1(61.06,85.12) ; v1(76.84,43.56) 76.84,44.13 76.64,44.32 C110.2 ; R130.2 v1(26.42,79.63) ; C23.2 v1(51.94,54.23) ; C114.2 v1(74.36,57.66) ; 55.37,49.66 v1(55.37,48.51) ; R45.1 v1(87.5,37.08) ; C30.2 v1(47.37,41.15) ; C52.2 v1(66.17,16.94) ; v1(77.22,49.76) 76.05,49.76 C111.2 ; C18.2 v1(50.42,41.15) ; R82.1 v1(52.27,82.85) ; C15.2 v1(55.25,38.35) ; D8.2 v1(89.79,85.22) ; C70.2 v1(66.22,32.99) ; C54.2 v1(35.15,13.06) ; C8.2 v1(63.25,53.85) ; C49.2 v1(57.98,40.83) ; C33.2 v1(42.55,41.02) ; C12.2 69.72,50.29 v1(69.85,50.16) ; C121.2 v1(60.91,84.12) ; C91.2 v1(76.84,23.37) ; C129.2 v1(68.58,78.1)
  BOTTOM w0.305: C140.2 v1(25.34,86.93)
  BOTTOM w0.381: C169.2 29.34,74.17 v1(30.86,72.64) ; v1(14.58,70.13) 14.58,70.68 14.8,70.89 C158.1 ; C99.2 75.13,85.72 v1(76.58,85.72) ; C98.2 v1(78.74,85.34) ; C151.1 v1(18.29,83.82)
  vias: v1(15.24,4.95) v1(15.24,3.68) v1(15.75,55.12) v1(15.75,54.23) v1(16.26,65.91) v1(16.64,4.95) v1(16.64,3.68) v1(16.89,55.12) v1(16.89,54.23) v1(17.27,65.91) v1(18.03,4.95) v1(18.03,3.68) v1(18.29,65.91) v1(19.3,65.91) v1(20.07,76.71) v1(20.07,75.44) v1(21.34,76.71) v1(21.34,75.44) v1(21.34,74.17) v1(22.61,75.44) v1(23.67,92.43) v1(23.7,93.42) v1(24.38,4.83) v1(24.97,93.42) v1(24.97,92.48) v1(26.16,4.83) v1(27.43,85.47) v1(28.19,4.83) v1(28.58,85.47) v1(29.72,85.47) v1(29.97,4.83) v1(30.86,85.47) v1(31.12,61.21) v1(31.12,60.33) v1(31.12,59.05) v1(31.12,57.66) v1(31.12,56.39) v1(32.89,66.17) v1(33.4,69.47) v1(33.4,68.45) v1(33.4,67.31) v1(34.14,67.26) v1(46.99,49.53) v1(46.99,48.26) v1(46.99,46.99) v1(46.99,45.72) v1(48.26,49.53) v1(48.26,48.26) v1(48.26,46.99) v1(48.26,45.72) v1(49.53,49.53) v1(49.53,48.26) v1(49.53,46.99) v1(49.53,45.72) v1(50.8,49.53) v1(50.8,48.26) v1(50.8,46.99) v1(50.8,45.72) v1(61.72,84.33) v1(61.85,85.09) v1(62.74,82.68) v1(63.37,83.31) v1(82.42,88.65) v1(82.42,86.49) v1(83.52,87.63) v1(84.45,88.65)
